# EAGLE board SparkFun_GNSS_NEO-M9N-Panel (EAGLE 9.6.2), part 1 of 3
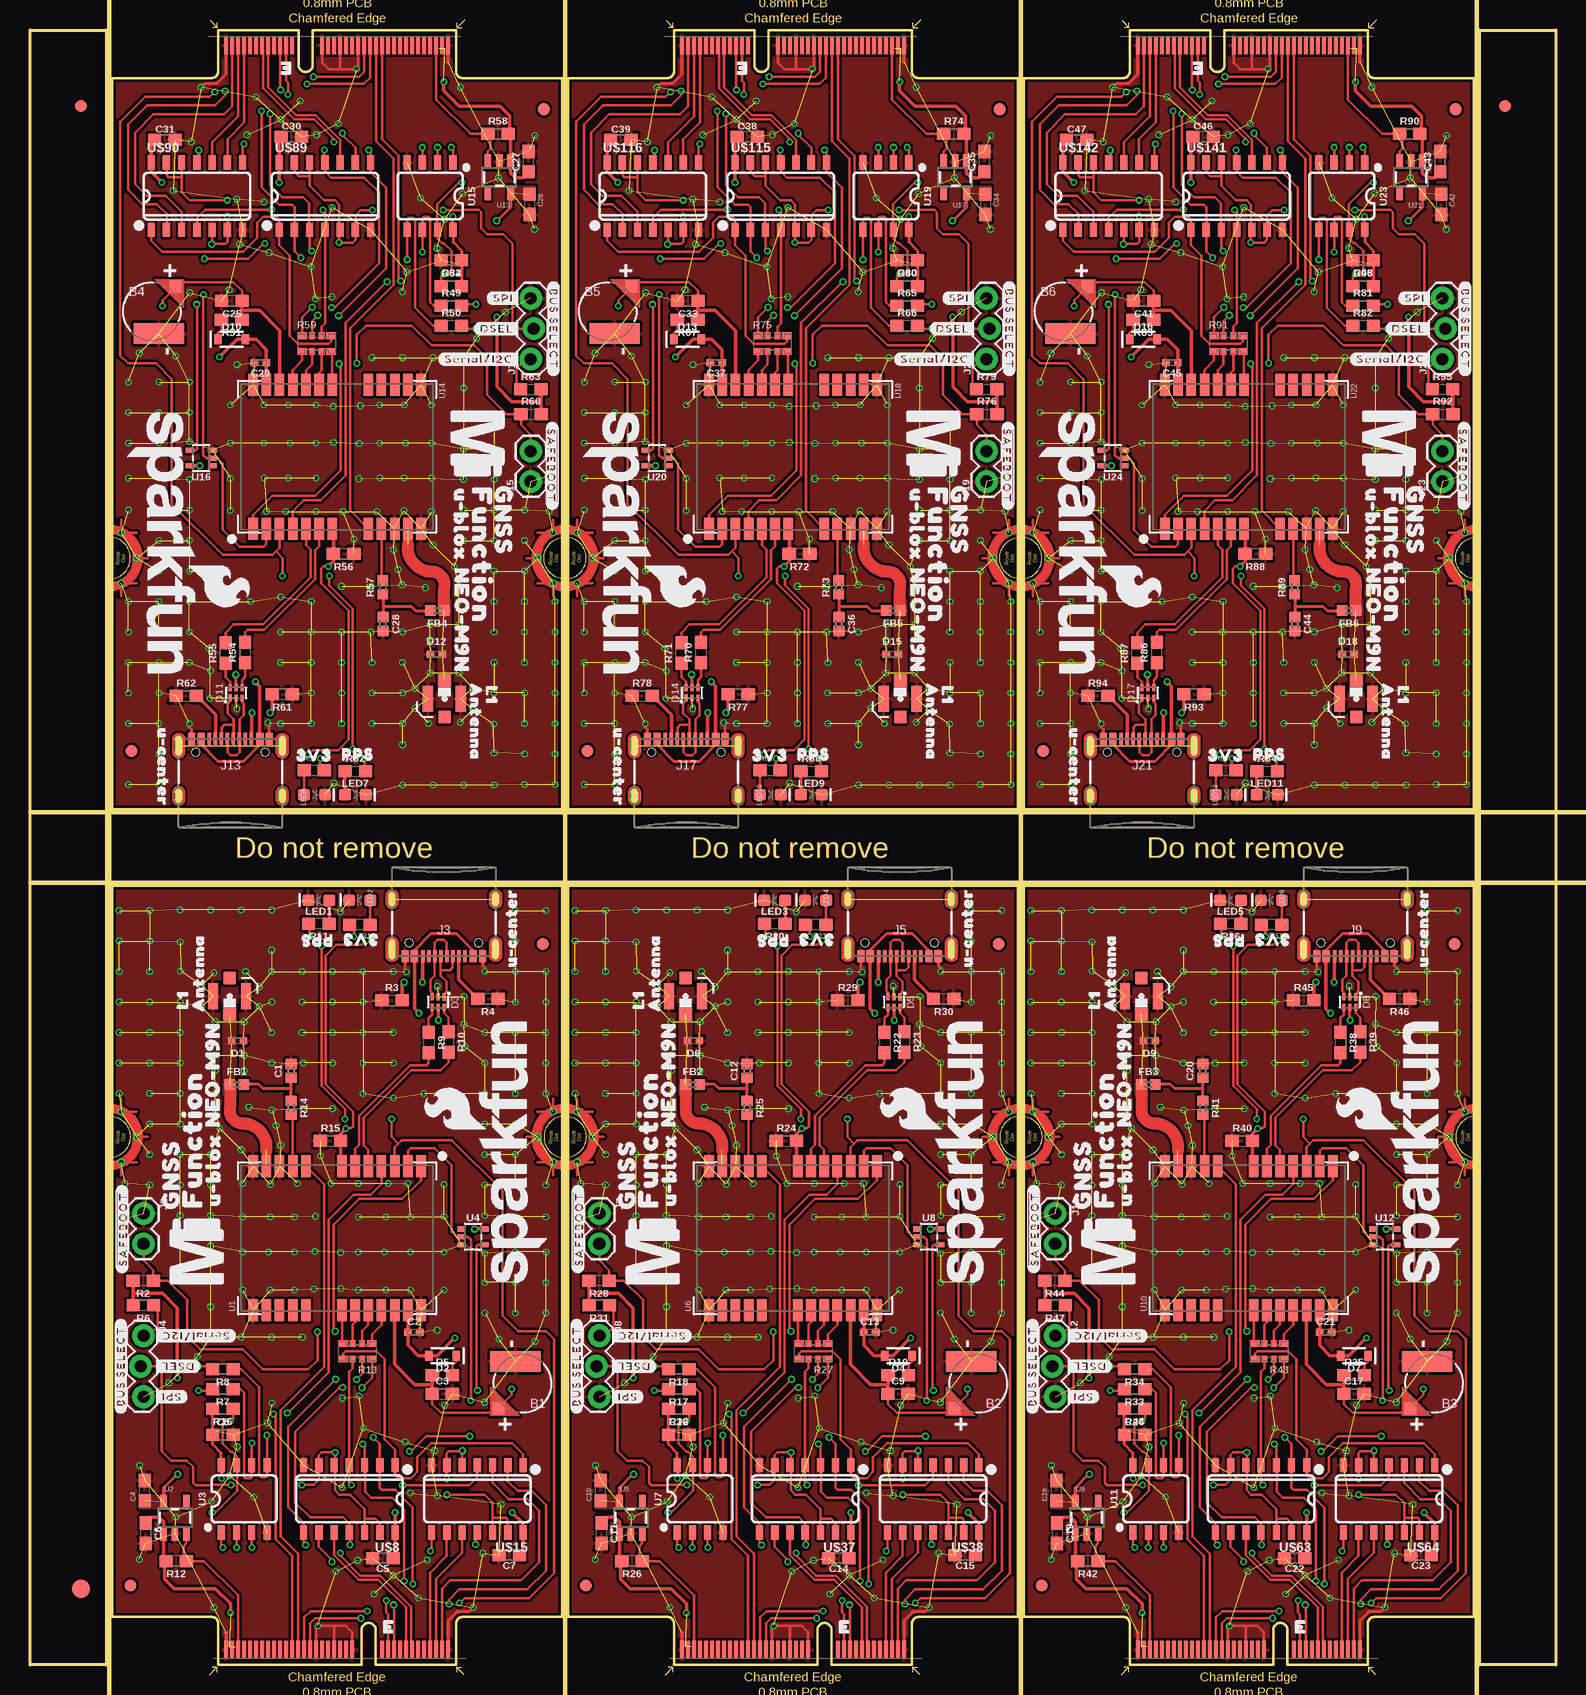
[diagram p0: board, top side]
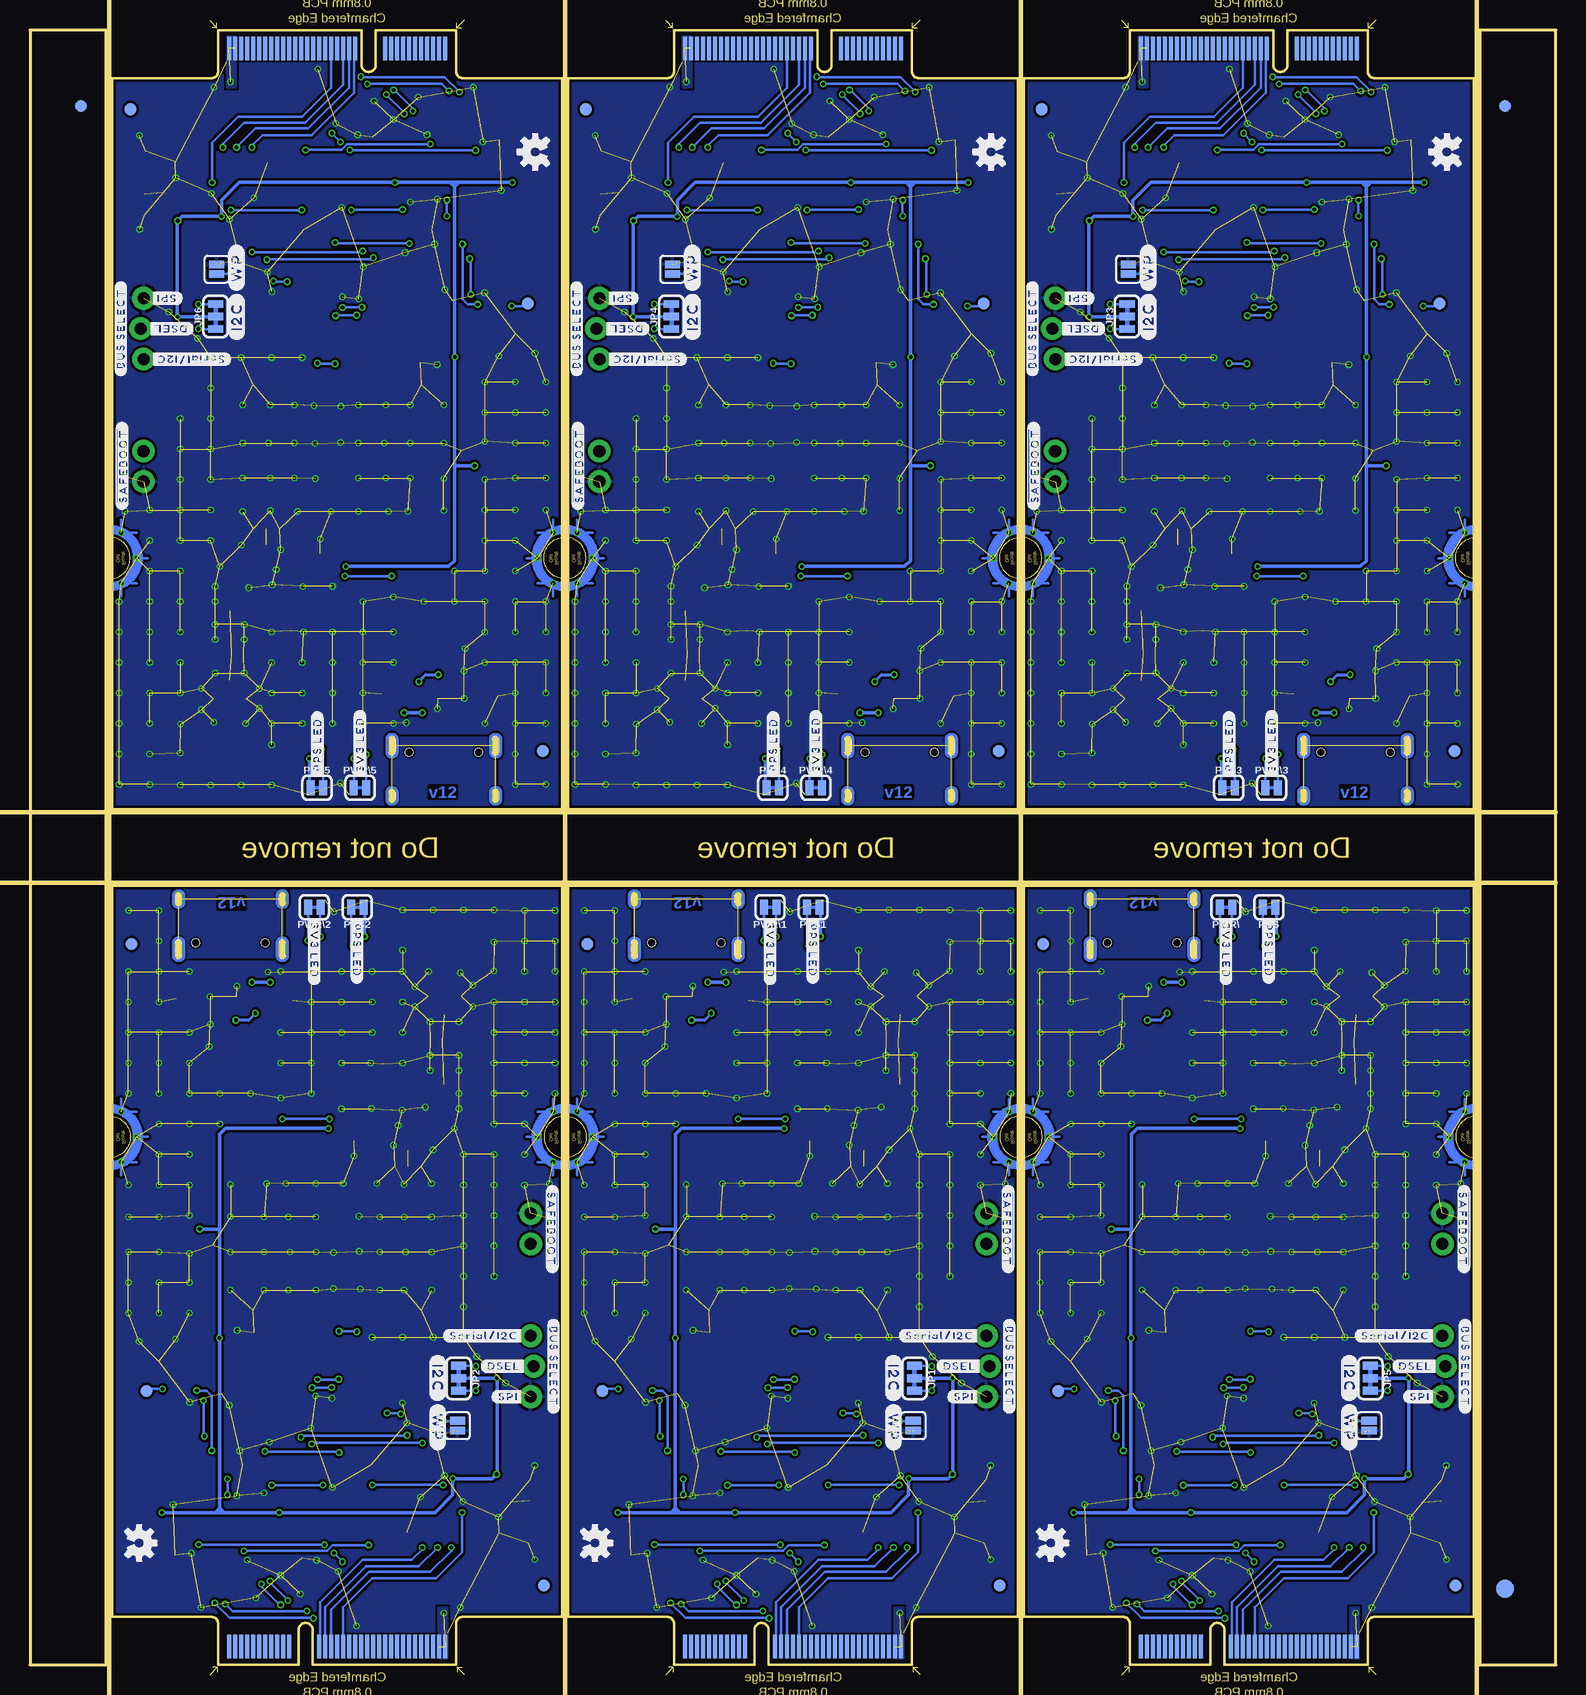
[diagram p1: board, bottom side, seen from below]

Size 127.2 x 136.25 mm. Coordinates in mm from the lower left corner, seen from the top.
Outline: 35.53,0 28.83,0 28.83,2.9 arc180 27.63,2.9 27.63,0 15.68,0 15.68,3.5 arc84 15.2,4 6.86,4 6.86,64.95 20.12,64.95 19.99,64.92 44.35,64.92 44.35,4 36.03,4 arc84 35.53,3.5 35.53,0
Outline: 73.53,0 66.83,0 66.83,2.9 arc180 65.63,2.9 65.63,0 53.68,0 53.68,3.5 arc84 53.2,4 44.86,4 44.86,64.95 58.11,64.95 57.99,64.92 82.35,64.92 82.35,4 74.03,4 arc84 73.53,3.5 73.53,0
Outline: 111.53,0 104.83,0 104.83,2.9 arc180 103.62,2.9 103.62,0 91.67,0 91.67,3.5 arc84 91.2,4 82.86,4 82.86,64.95 96.11,64.95 95.99,64.92 120.34,64.92 120.34,4 112.03,4 arc84 111.53,3.5 111.53,0
Outline: 15.68,136.25 22.38,136.25 22.38,133.35 arc180 23.58,133.35 23.58,136.25 35.53,136.25 35.53,132.75 arc84 36,132.25 44.35,132.25 44.35,71.3 31.09,71.3 31.22,71.32 6.86,71.32 6.86,132.25 15.18,132.25 arc84 15.68,132.75 15.68,136.25
Outline: 53.68,136.25 60.38,136.25 60.38,133.35 arc180 61.58,133.35 61.58,136.25 73.53,136.25 73.53,132.75 arc84 74,132.25 82.35,132.25 82.35,71.3 69.09,71.3 69.22,71.32 44.86,71.32 44.86,132.25 53.18,132.25 arc84 53.68,132.75 53.68,136.25
Outline: 91.67,136.25 98.38,136.25 98.38,133.35 arc180 99.58,133.35 99.58,136.25 111.53,136.25 111.53,132.75 arc84 112,132.25 120.34,132.25 120.34,71.3 107.09,71.3 107.21,71.32 82.86,71.32 82.86,132.25 91.17,132.25 arc84 91.67,132.75 91.67,136.25
Outline: 120.85,136.25 127.2,136.25 127.2,0 120.85,0 120.85,136.25
Outline: 0,136.25 6.35,136.25 6.35,0 0,0 0,136.25
Copper layers (1*16): Top 0.035mm / dielectric 1.5mm / Bottom 0.035mm
Design rules "SparkFun_GNSS_NEO-M9N": minimum track width 5mil, minimum drill 0.3mm, track to track 5mil, track to pad 5mil, pad to pad 5mil, via to via 5mil, smd to smd 5mil, copper to edge 7mil, drill to drill 7mil, minimum pad ring 5mil, minimum via ring 5mil, stop-mask expansion 2.5mil, vias tented up to drill 25mil, thermal gap 10mil
Net classes: 0 default: width 0.203 mm; 2 3.3V: width 0.203 mm; 3 Antenna: width 1 mm, clearance 0.3 mm
Milling: 6 lines

## Footprints (pad centres in the part's own frame; a part is rotated, then mirrored left to right if it is on the bottom)
MS421R_IV03E = smd 1 x 1: + 2.022,2.032 | smd 4.2 x 1.7: - 0.6,-1.85
0402 = smd 0.85 x 0.9: 1 -0.58,0; 2 0.58,0
0402-TIGHT = smd 0.6 x 0.6: 1 -0.5,0; 2 0.5,0
0603 = smd 1.1 x 1: 1 -0.85,0; 2 0.85,0
SOD-323 = smd 0.63 x 0.83: A 1.15,0; C -1.15,0
SOT886 = smd 0.61 x 0.25: 1 -0.405,0.5 | smd 0.56 x 0.25: 2 -0.43,0; 3 -0.43,-0.5; 4 0.43,-0.5; 5 0.43,0; 6 0.43,0.5
U.FL = smd 2.2 x 0.85: 1 0,1.375; 2 0,-1.375 | smd 1.05 x 1: FEED 1.525,0; NC -1.525,0
FIDUCIAL-1X2 = smd 1 x 1: 1 0,0
FIDUCIAL-1.5X3 = smd 1.5 x 1.5: 1 0,0
M.2-CARD-E-22_FUNCTION_STANDARD = smd 0.35 x 1.45: 1 9.25,1.275; 3 8.75,1.275; 5 8.25,1.275; 7 7.75,1.275; 9 7.25,1.275; 11 6.75,1.275; 13 6.25,1.275; 15 5.75,1.275; 17 5.25,1.275; 19 4.75,1.275; 21 4.25,1.275; 23 3.75,1.275; 33 1.25,1.275; 35 0.75,1.275; 37 0.25,1.275; 39 -0.25,1.275; 41 -0.75,1.275; 43 -1.25,1.275; 45 -1.75,1.275; 47 -2.25,1.275; 49 -2.75,1.275; 51 -3.25,1.275; 53 -3.75,1.275; 55 -4.25,1.275; 57 -4.75,1.275; 59 -5.25,1.275; 61 -5.75,1.275; 63 -6.25,1.275; 65 -6.75,1.275; 67 -7.25,1.275; 69 -7.75,1.275; 71 -8.25,1.275; 73 -8.75,1.275; 75 -9.25,1.275 | smd 0.35 x 1.95 bottom: 2 9,1.525; 4 8.5,1.525; 6 8,1.525; 8 7.5,1.525; 10 7,1.525; 12 6.5,1.525; 14 6,1.525; 16 5.5,1.525; 18 5,1.525; 20 4.5,1.525; 22 4,1.525; 32 1.5,1.525; 34 1,1.525; 36 0.5,1.525; 38 0,1.525; 40 -0.5,1.525; 42 -1,1.525; 44 -1.5,1.525; 46 -2,1.525; 48 -2.5,1.525; 50 -3,1.525; 52 -3.5,1.525; 54 -4,1.525; 56 -4.5,1.525; 58 -5,1.525; 60 -5.5,1.525; 62 -6,1.525; 64 -6.5,1.525; 66 -7,1.525; 68 -7.5,1.525; 70 -8,1.525; 72 -8.5,1.525; 74 -9,1.525 | drill 0.305 pad 0.61: GND1 -18,41.9; GND2 -16.7,44; GND3 -18,46.1; GND4 18,41.9; GND5 16.7,44; GND6 18,46.1
1X02 = drill 1.016 pad 1.88: 1 0,0; 2 2.54,0
USB-C-16P-2LAYER-PADS = smd 0.3 x 1: A5 -1.25,-0.34; A6 -0.25,-0.34; A7 0.25,-0.34; A8 1.25,-0.34; B5 1.75,-0.34; B6 0.75,-0.34; B7 -0.75,-0.34; B8 -1.75,-0.34 | smd 0.6 x 1: GND -3.225,-0.34; GND2 3.225,-0.34; VBUS1 -2.45,-0.34; VBUS2 2.45,-0.34 | drill 0.4 pad 0.6 long: SHLD1 -4.318,-0.915; SHLD2 4.318,-0.915; SHLD3 -4.318,-5.095; SHLD4 4.318,-5.095 | hole 0.65: -2.89,-1.445; 2.89,-1.445
1X03_LOCK = drill 1.016 pad 1.88: 1 0,0.127; 2 2.54,-0.127; 3 5.08,0.127
SMT-JUMPER_3_2-NC_TRACE_SILK = smd 0.66 x 1.27: 1 -1.041,0; 2 0,0; 3 1.041,0
LED-0603 = smd 1 x 1: A -0.877,0; C 0.877,0
SMT-JUMPER_2_NC_TRACE_SILK = smd 0.66 x 1.27: 1 -0.521,0; 2 0.521,0
1206_RA = smd 0.8 x 0.55: P1 -1.2,-0.62; P4 1.2,-0.62; P5 1.2,0.68; P8 -1.2,0.68 | smd 0.5 x 0.55: P2 -0.4,-0.62; P3 0.4,-0.62; P6 0.4,0.68; P7 -0.4,0.68
PAD.03X.04 = smd 1.016 x 1.016: 1 0,0
NEO-M9N/M8T/M8U/D9S = smd 1.8 x 0.8: 1 6,-7; 2 6,-5.9; 3 6,-4.8; 4 6,-3.7; 5 6,-2.6; 6 6,-1.5; 7 6,-0.4; 8 6,2.6; 9 6,3.7; 10 6,4.8; 11 6,5.9; 12 6,7; 13 -6,7; 14 -6,5.9; 15 -6,4.8; 16 -6,3.7; 17 -6,2.6; 18 -6,-0.4; 19 -6,-1.5; 20 -6,-2.6; 21 -6,-3.7; 22 -6,-4.8; 23 -6,-5.9; 24 -6,-7
SOT23-5 = smd 0.55 x 1.2: 1 -0.95,-1.3; 2 0,-1.3; 3 0.95,-1.3; 4 0.95,1.3; 5 -0.95,1.3
SO08 = smd 0.6 x 1.2: 1 -1.905,-2.8; 2 -0.635,-2.8; 3 0.635,-2.8; 4 1.905,-2.8; 5 1.905,2.8; 6 0.635,2.8; 7 -0.635,2.8; 8 -1.905,2.8
SOT353 = smd 0.42 x 0.7: 1 -0.65,-0.95; 2 0,-0.95; 3 0.65,-0.95; 4 0.65,0.95; 5 -0.65,0.95
SO14 = smd 0.6 x 1.2: 1 -3.175,-2.8; 2 -1.905,-2.8; 3 -0.635,-2.8; 4 0.635,-2.8; 5 1.905,-2.8; 6 3.175,-2.8; 7 4.445,-2.8; 8 4.445,2.8; 9 3.175,2.8; 10 1.905,2.8; 11 0.635,2.8; 12 -0.635,2.8; 13 -1.905,2.8; 14 -3.175,2.8
SMT-JUMPER_2_NO_SILK = smd 0.635 x 1.27: 1 -0.406,0; 2 0.406,0

## Placement (x,y rotation side)
B1  6.8MM_COIN_CELL  [MS421R_IV03E]  41.07,23.44 180 top
B2  6.8MM_COIN_CELL  [MS421R_IV03E]  79.07,23.44 180 top
B3  6.8MM_COIN_CELL  [MS421R_IV03E]  117.07,23.44 180 top
B4  6.8MM_COIN_CELL  [MS421R_IV03E]  10.13,112.8 0 top
B5  6.8MM_COIN_CELL  [MS421R_IV03E]  48.13,112.8 0 top
B6  6.8MM_COIN_CELL  [MS421R_IV03E]  86.13,112.8 0 top
C1  47pF  [0402]  21.77,49.5 90 top
C2  0.1uF  [0402-TIGHT]  32,27.74 0 top
C3  1.0uF  [0603]  34.36,22.58 0 top
C4  1.0uF  [0603]  9.58,14.53 90 top
C5  0.1uF  [0603]  29.41,8.89 180 top
C6  1.0uF  [0603]  9.63,10.97 270 top
C7  0.1uF  [0603]  39.95,9.14 180 top
C8  0.1uF  [0603]  16.08,19.18 0 top
C9  1.0uF  [0603]  72.36,22.58 0 top
C10  1.0uF  [0603]  47.57,14.53 90 top
C11  1.0uF  [0603]  47.62,10.97 270 top
C12  47pF  [0402]  59.77,49.5 90 top
C13  0.1uF  [0402-TIGHT]  70,27.74 0 top
C14  0.1uF  [0603]  67.41,8.89 180 top
C15  0.1uF  [0603]  77.95,9.14 180 top
C16  0.1uF  [0603]  54.08,19.18 0 top
C17  1.0uF  [0603]  110.36,22.58 0 top
C18  1.0uF  [0603]  85.57,14.53 90 top
C19  1.0uF  [0603]  85.62,10.97 270 top
C20  47pF  [0402]  97.77,49.5 90 top
C21  0.1uF  [0402-TIGHT]  108,27.74 0 top
C22  0.1uF  [0603]  105.41,8.89 180 top
C23  0.1uF  [0603]  115.95,9.14 180 top
C24  0.1uF  [0603]  92.08,19.18 0 top
C25  1.0uF  [0603]  16.84,113.67 180 top
C26  1.0uF  [0603]  41.63,121.72 270 top
C27  1.0uF  [0603]  41.58,125.27 90 top
C28  47pF  [0402]  29.43,86.74 270 top
C29  0.1uF  [0402-TIGHT]  19.2,108.51 180 top
C30  0.1uF  [0603]  21.79,127.36 0 top
C31  0.1uF  [0603]  11.25,127.1 0 top
C32  0.1uF  [0603]  35.13,117.07 180 top
C33  1.0uF  [0603]  54.84,113.67 180 top
C34  1.0uF  [0603]  79.63,121.72 270 top
C35  1.0uF  [0603]  79.58,125.27 90 top
C36  47pF  [0402]  67.43,86.74 270 top
C37  0.1uF  [0402-TIGHT]  57.2,108.51 180 top
C38  0.1uF  [0603]  59.79,127.36 0 top
C39  0.1uF  [0603]  49.25,127.1 0 top
C40  0.1uF  [0603]  73.13,117.07 180 top
C41  1.0uF  [0603]  92.84,113.67 180 top
C42  1.0uF  [0603]  117.63,121.72 270 top
C43  1.0uF  [0603]  117.58,125.27 90 top
C44  47pF  [0402]  105.43,86.74 270 top
C45  0.1uF  [0402-TIGHT]  95.2,108.51 180 top
C46  0.1uF  [0603]  97.79,127.36 0 top
C47  0.1uF  [0603]  87.25,127.1 0 top
C48  0.1uF  [0603]  111.12,117.07 180 top
D1  PESD0402-0402T  [0402-TIGHT]  17.32,52.03 180 top
D2  0.5A/40V/420mV  [SOD-323]  34.39,25.78 180 top
D3  PRTR5V0U2F  [SOT886]  34.01,55.24 270 top
D4  0.5A/40V/420mV  [SOD-323]  72.39,25.78 180 top
D5  PRTR5V0U2F  [SOT886]  72.01,55.24 270 top
D6  PESD0402-0402T  [0402-TIGHT]  55.32,52.03 180 top
D7  0.5A/40V/420mV  [SOD-323]  110.39,25.78 180 top
D8  PRTR5V0U2F  [SOT886]  110.01,55.24 270 top
D9  PESD0402-0402T  [0402-TIGHT]  93.32,52.03 180 top
D10  0.5A/40V/420mV  [SOD-323]  16.82,110.46 0 top
D11  PRTR5V0U2F  [SOT886]  17.2,81 90 top
D12  PESD0402-0402T  [0402-TIGHT]  33.88,84.22 0 top
D13  0.5A/40V/420mV  [SOD-323]  54.81,110.46 0 top
D14  PRTR5V0U2F  [SOT886]  55.19,81 90 top
D15  PESD0402-0402T  [0402-TIGHT]  71.88,84.22 0 top
D16  0.5A/40V/420mV  [SOD-323]  92.81,110.46 0 top
D17  PRTR5V0U2F  [SOT886]  93.19,81 90 top
D18  PESD0402-0402T  [0402-TIGHT]  109.88,84.22 0 top
E1  U.FL  [U.FL]  16.66,55.73 270 top
E2  U.FL  [U.FL]  54.66,55.73 270 top
E3  U.FL  [U.FL]  92.65,55.73 270 top
E4  U.FL  [U.FL]  34.55,80.52 90 top
E5  U.FL  [U.FL]  72.55,80.52 90 top
E6  U.FL  [U.FL]  110.55,80.52 90 top
E$1  [FIDUCIAL-1X2]  4.23,129.9 0 top
E$2  [FIDUCIAL-1X2]  4.23,129.9 0 bottom
E$3  [FIDUCIAL-1X2]  122.97,129.9 0 top
E$4  [FIDUCIAL-1X2]  122.97,129.9 0 bottom
E$5  [FIDUCIAL-1.5X3]  4.23,6.35 0 top
E$6  [FIDUCIAL-1.5X3]  4.23,6.35 0 bottom
FB1  120Ω  [0402]  17.25,48.38 0 top
FB2  120Ω  [0402]  55.25,48.38 0 top
FB3  120Ω  [0402]  93.24,48.38 0 top
FB4  120Ω  [0402]  33.96,87.87 180 top
FB5  120Ω  [0402]  71.96,87.87 180 top
FB6  120Ω  [0402]  109.96,87.87 180 top
FD1  FIDUCIAL1X2  [FIDUCIAL-1X2]  8.36,6.6 270 bottom
FD2  FIDUCIAL1X2  [FIDUCIAL-1X2]  8.36,6.6 90 top
FD3  FIDUCIAL1X2  [FIDUCIAL-1X2]  42.75,60.07 270 bottom
FD4  FIDUCIAL1X2  [FIDUCIAL-1X2]  42.75,60.07 90 top
FD5  FIDUCIAL1X2  [FIDUCIAL-1X2]  46.35,6.6 270 bottom
FD6  FIDUCIAL1X2  [FIDUCIAL-1X2]  46.35,6.6 90 top
FD7  FIDUCIAL1X2  [FIDUCIAL-1X2]  80.75,60.07 270 bottom
FD8  FIDUCIAL1X2  [FIDUCIAL-1X2]  80.75,60.07 90 top
FD9  FIDUCIAL1X2  [FIDUCIAL-1X2]  84.35,6.6 270 bottom
FD10  FIDUCIAL1X2  [FIDUCIAL-1X2]  84.35,6.6 90 top
FD11  FIDUCIAL1X2  [FIDUCIAL-1X2]  118.75,60.07 270 bottom
FD12  FIDUCIAL1X2  [FIDUCIAL-1X2]  118.75,60.07 90 top
FD13  FIDUCIAL1X2  [FIDUCIAL-1X2]  42.85,129.64 90 bottom
FD14  FIDUCIAL1X2  [FIDUCIAL-1X2]  42.85,129.64 270 top
FD15  FIDUCIAL1X2  [FIDUCIAL-1X2]  8.46,76.18 90 bottom
FD16  FIDUCIAL1X2  [FIDUCIAL-1X2]  8.46,76.18 270 top
FD17  FIDUCIAL1X2  [FIDUCIAL-1X2]  80.85,129.64 90 bottom
FD18  FIDUCIAL1X2  [FIDUCIAL-1X2]  80.85,129.64 270 top
FD19  FIDUCIAL1X2  [FIDUCIAL-1X2]  46.46,76.18 90 bottom
FD20  FIDUCIAL1X2  [FIDUCIAL-1X2]  46.46,76.18 270 top
FD21  FIDUCIAL1X2  [FIDUCIAL-1X2]  118.85,129.64 90 bottom
FD22  FIDUCIAL1X2  [FIDUCIAL-1X2]  118.85,129.64 270 top
FD23  FIDUCIAL1X2  [FIDUCIAL-1X2]  84.45,76.18 90 bottom
FD24  FIDUCIAL1X2  [FIDUCIAL-1X2]  84.45,76.18 270 top
J1  MICROMOD_FUNCTION_STANDARD  [M.2-CARD-E-22_FUNCTION_STANDARD]  25.6,0 0 top
J2  [1X02]  9.47,37.63 270 top
J3  [USB-C-16P-2LAYER-PADS]  34.49,58.72 180 top
J4  Bus Selection  [1X03_LOCK]  9.35,27.43 270 top
J5  [USB-C-16P-2LAYER-PADS]  72.49,58.72 180 top
J6  MICROMOD_FUNCTION_STANDARD  [M.2-CARD-E-22_FUNCTION_STANDARD]  63.6,0 0 top
J7  [1X02]  47.46,37.63 270 top
J8  Bus Selection  [1X03_LOCK]  47.35,27.43 270 top
J9  [USB-C-16P-2LAYER-PADS]  110.49,58.72 180 top
J10  MICROMOD_FUNCTION_STANDARD  [M.2-CARD-E-22_FUNCTION_STANDARD]  101.6,0 0 top
J11  [1X02]  85.46,37.63 270 top
J12  Bus Selection  [1X03_LOCK]  85.34,27.43 270 top
J13  [USB-C-16P-2LAYER-PADS]  16.71,77.52 0 top
J14  MICROMOD_FUNCTION_STANDARD  [M.2-CARD-E-22_FUNCTION_STANDARD]  25.6,136.25 180 top
J15  [1X02]  41.74,98.61 90 top
J16  Bus Selection  [1X03_LOCK]  41.86,108.81 90 top
J17  [USB-C-16P-2LAYER-PADS]  54.71,77.52 0 top
J18  MICROMOD_FUNCTION_STANDARD  [M.2-CARD-E-22_FUNCTION_STANDARD]  63.6,136.25 180 top
J19  [1X02]  79.74,98.61 90 top
J20  Bus Selection  [1X03_LOCK]  79.86,108.81 90 top
J21  [USB-C-16P-2LAYER-PADS]  92.71,77.52 0 top
J22  MICROMOD_FUNCTION_STANDARD  [M.2-CARD-E-22_FUNCTION_STANDARD]  101.6,136.25 180 top
J23  [1X02]  117.74,98.61 90 top
J24  Bus Selection  [1X03_LOCK]  117.86,108.81 90 top
JP1  JUMPER-SMT_3_2-NC_TRACE_SILK  [SMT-JUMPER_3_2-NC_TRACE_SILK]  53.47,23.88 270 bottom
JP2  JUMPER-SMT_3_2-NC_TRACE_SILK  [SMT-JUMPER_3_2-NC_TRACE_SILK]  91.47,23.88 270 bottom
JP3  JUMPER-SMT_3_2-NC_TRACE_SILK  [SMT-JUMPER_3_2-NC_TRACE_SILK]  35.74,112.37 90 bottom
JP4  JUMPER-SMT_3_2-NC_TRACE_SILK  [SMT-JUMPER_3_2-NC_TRACE_SILK]  73.74,112.37 90 bottom
JP5  JUMPER-SMT_3_2-NC_TRACE_SILK  [SMT-JUMPER_3_2-NC_TRACE_SILK]  15.47,23.88 270 bottom
JP6  JUMPER-SMT_3_2-NC_TRACE_SILK  [SMT-JUMPER_3_2-NC_TRACE_SILK]  111.73,112.37 90 bottom
LED1  BLUE  [LED-0603]  24.08,63.73 180 top
LED2  RED  [LED-0603]  27.48,63.73 180 top
LED3  BLUE  [LED-0603]  62.08,63.73 180 top
LED4  RED  [LED-0603]  65.48,63.73 180 top
LED5  BLUE  [LED-0603]  100.08,63.73 180 top
LED6  RED  [LED-0603]  103.48,63.73 180 top
LED7  BLUE  [LED-0603]  27.13,72.52 0 top
LED8  RED  [LED-0603]  23.72,72.52 0 top
LED9  BLUE  [LED-0603]  65.13,72.52 0 top
LED10  RED  [LED-0603]  61.72,72.52 0 top
LED11  BLUE  [LED-0603]  103.12,72.52 0 top
LED12  RED  [LED-0603]  99.72,72.52 0 top
LOGO1  SFE_LOGO_NAME_FLAME.2_INCH  [SFE_LOGO_NAME_FLAME_.2]  78.23,42.8 90 top
LOGO2  SFE_LOGO_NAME_FLAME.2_INCH  [SFE_LOGO_NAME_FLAME_.2]  40.23,42.8 90 top
LOGO3  OSHW-LOGOS  [OSHW-LOGO-S]  42.11,10.16 270 bottom
LOGO4  OSHW-LOGOS  [OSHW-LOGO-S]  80.11,10.16 270 bottom
LOGO5  SFE_LOGO_NAME_FLAME.2_INCH  [SFE_LOGO_NAME_FLAME_.2]  116.23,42.8 90 top
LOGO6  OSHW-LOGOS  [OSHW-LOGO-S]  118.11,10.16 270 bottom
LOGO7  SFE_LOGO_NAME_FLAME.2_INCH  [SFE_LOGO_NAME_FLAME_.2]  10.97,93.45 270 top
LOGO8  OSHW-LOGOS  [OSHW-LOGO-S]  9.09,126.09 90 bottom
LOGO9  SFE_LOGO_NAME_FLAME.2_INCH  [SFE_LOGO_NAME_FLAME_.2]  48.97,93.45 270 top
LOGO10  OSHW-LOGOS  [OSHW-LOGO-S]  47.09,126.09 90 bottom
LOGO11  SFE_LOGO_NAME_FLAME.2_INCH  [SFE_LOGO_NAME_FLAME_.2]  86.97,93.45 270 top
LOGO12  OSHW-LOGOS  [OSHW-LOGO-S]  85.09,126.09 90 bottom
PPS  JUMPER-SMT_2_NC_TRACE_SILK  [SMT-JUMPER_2_NC_TRACE_SILK]  23.93,63.14 180 bottom
PPS1  JUMPER-SMT_2_NC_TRACE_SILK  [SMT-JUMPER_2_NC_TRACE_SILK]  61.93,63.14 180 bottom
PPS2  JUMPER-SMT_2_NC_TRACE_SILK  [SMT-JUMPER_2_NC_TRACE_SILK]  99.92,63.14 180 bottom
PPS3  JUMPER-SMT_2_NC_TRACE_SILK  [SMT-JUMPER_2_NC_TRACE_SILK]  27.28,73.1 0 bottom
PPS4  JUMPER-SMT_2_NC_TRACE_SILK  [SMT-JUMPER_2_NC_TRACE_SILK]  65.28,73.1 0 bottom
PPS5  JUMPER-SMT_2_NC_TRACE_SILK  [SMT-JUMPER_2_NC_TRACE_SILK]  103.28,73.1 0 bottom
PWR\  JUMPER-SMT_2_NC_TRACE_SILK  [SMT-JUMPER_2_NC_TRACE_SILK]  27.51,63.14 180 bottom
PWR\1  JUMPER-SMT_2_NC_TRACE_SILK  [SMT-JUMPER_2_NC_TRACE_SILK]  65.51,63.14 180 bottom
PWR\2  JUMPER-SMT_2_NC_TRACE_SILK  [SMT-JUMPER_2_NC_TRACE_SILK]  103.51,63.14 180 bottom
PWR\3  JUMPER-SMT_2_NC_TRACE_SILK  [SMT-JUMPER_2_NC_TRACE_SILK]  23.7,73.1 0 bottom
PWR\4  JUMPER-SMT_2_NC_TRACE_SILK  [SMT-JUMPER_2_NC_TRACE_SILK]  61.7,73.1 0 bottom
PWR\5  JUMPER-SMT_2_NC_TRACE_SILK  [SMT-JUMPER_2_NC_TRACE_SILK]  99.7,73.1 0 bottom
R1  1k  [0603]  27.51,61.7 180 top
R2  10k  [0603]  9.43,32.02 180 top
R3  5.1k  [0603]  30.18,55.37 0 top
R4  5.1k  [0603]  38.18,55.5 180 top
R5  3.3k  [0603]  34.39,24.16 0 top
R6  10k  [0603]  9.45,29.95 180 top
R7  2.2k  [0603]  16.08,22.99 180 top
R8  2.2k  [0603]  16.08,24.64 180 top
R9  27  [0603]  33.25,51.87 270 top
R10  27  [0603]  34.9,51.92 270 top
R11  1k  [0603]  24.08,61.77 180 top
R12  100k  [0603]  12.19,8.66 180 top
R13  33  [1206_RA]  27.3,26.16 180 top
R14  33  [0402]  21.78,46.43 270 top
R15  100k  [0603]  25.06,43.66 0 top
R16  10k  [0603]  16.08,21.34 180 top
R17  2.2k  [0603]  54.08,22.99 180 top
R18  2.2k  [0603]  54.08,24.64 180 top
R19  3.3k  [0603]  72.39,24.16 0 top
R20  1k  [0603]  62.08,61.77 180 top
R21  1k  [0603]  65.51,61.7 180 top
R22  27  [0603]  71.25,51.87 270 top
R23  27  [0603]  72.9,51.92 270 top
R24  100k  [0603]  63.06,43.66 0 top
R25  33  [0402]  59.78,46.43 270 top
R26  100k  [0603]  50.19,8.66 180 top
R27  33  [1206_RA]  65.3,26.16 180 top
R28  10k  [0603]  47.43,32.02 180 top
R29  5.1k  [0603]  68.17,55.37 0 top
R30  5.1k  [0603]  76.17,55.5 180 top
R31  10k  [0603]  47.45,29.95 180 top
R32  10k  [0603]  54.08,21.34 180 top
R33  2.2k  [0603]  92.08,22.99 180 top
R34  2.2k  [0603]  92.08,24.64 180 top
R35  3.3k  [0603]  110.39,24.16 0 top
R36  1k  [0603]  100.08,61.77 180 top
R37  1k  [0603]  103.51,61.7 180 top
R38  27  [0603]  109.25,51.87 270 top
R39  27  [0603]  110.9,51.92 270 top
R40  100k  [0603]  101.06,43.66 0 top
R41  33  [0402]  97.78,46.43 270 top
R42  100k  [0603]  88.19,8.66 180 top
R43  33  [1206_RA]  103.3,26.16 180 top
R44  10k  [0603]  85.43,32.02 180 top
R45  5.1k  [0603]  106.17,55.37 0 top
R46  5.1k  [0603]  114.17,55.5 180 top
R47  10k  [0603]  85.45,29.95 180 top
R48  10k  [0603]  92.08,21.34 180 top
R49  2.2k  [0603]  35.13,113.26 0 top
R50  2.2k  [0603]  35.13,111.61 0 top
R51  3.3k  [0603]  16.82,112.09 180 top
R52  1k  [0603]  27.13,74.47 0 top
R53  1k  [0603]  23.7,74.55 0 top
R54  27  [0603]  17.96,84.38 90 top
R55  27  [0603]  16.31,84.33 90 top
R56  100k  [0603]  26.15,92.58 180 top
R57  33  [0402]  29.42,89.81 90 top
R58  100k  [0603]  39.01,127.58 0 top
R59  33  [1206_RA]  23.9,110.08 0 top
R60  10k  [0603]  41.77,104.23 0 top
R61  5.1k  [0603]  21.03,80.87 180 top
R62  5.1k  [0603]  13.03,80.75 0 top
R63  10k  [0603]  41.75,106.29 0 top
R64  10k  [0603]  35.13,114.91 0 top
R65  2.2k  [0603]  73.13,113.26 0 top
R66  2.2k  [0603]  73.13,111.61 0 top
R67  3.3k  [0603]  54.81,112.09 180 top
R68  1k  [0603]  65.13,74.47 0 top
R69  1k  [0603]  61.7,74.55 0 top
R70  27  [0603]  55.96,84.38 90 top
R71  27  [0603]  54.31,84.33 90 top
R72  100k  [0603]  64.15,92.58 180 top
R73  33  [0402]  67.42,89.81 90 top
R74  100k  [0603]  77.01,127.58 0 top
R75  33  [1206_RA]  61.9,110.08 0 top
R76  10k  [0603]  79.77,104.23 0 top
R77  5.1k  [0603]  59.03,80.87 180 top
R78  5.1k  [0603]  51.03,80.75 0 top
R79  10k  [0603]  79.75,106.29 0 top
R80  10k  [0603]  73.13,114.91 0 top
R81  2.2k  [0603]  111.12,113.26 0 top
R82  2.2k  [0603]  111.12,111.61 0 top
R83  3.3k  [0603]  92.81,112.09 180 top
R84  1k  [0603]  103.12,74.47 0 top
R85  1k  [0603]  99.7,74.55 0 top
R86  27  [0603]  93.95,84.38 90 top
R87  27  [0603]  92.3,84.33 90 top
R88  100k  [0603]  102.15,92.58 180 top
R89  33  [0402]  105.42,89.81 90 top
R90  100k  [0603]  115.01,127.58 0 top
R91  33  [1206_RA]  99.9,110.08 0 top
R92  10k  [0603]  117.77,104.23 0 top
R93  5.1k  [0603]  97.03,80.87 180 top
R94  5.1k  [0603]  89.03,80.75 0 top
R95  10k  [0603]  117.75,106.29 0 top
R96  10k  [0603]  111.12,114.91 0 top
TP1  TEST-POINT3X4  [PAD.03X.04]  41.5,22.81 180 bottom
TP2  TEST-POINT3X4  [PAD.03X.04]  79.5,22.81 180 bottom
TP3  TEST-POINT3X4  [PAD.03X.04]  117.5,22.81 180 bottom
TP4  TEST-POINT3X4  [PAD.03X.04]  9.7,113.44 0 bottom
TP5  TEST-POINT3X4  [PAD.03X.04]  47.7,113.44 0 bottom
TP6  TEST-POINT3X4  [PAD.03X.04]  85.7,113.44 0 bottom
U1  U-BLOX_NEO-M9N  [NEO-M9N/M8T/M8U/D9S]  25.6,35.56 90 top
U2  3.3V  [SOT23-5]  12.09,12.27 0 top
U3  EEPROM  [SO08]  17.86,13.84 0 top
U4  74HC1G04  [SOT353]  36.93,35.68 270 top
U5  3.3V  [SOT23-5]  50.09,12.27 0 top
U6  U-BLOX_NEO-M9N  [NEO-M9N/M8T/M8U/D9S]  63.6,35.56 90 top
U7  EEPROM  [SO08]  55.85,13.84 0 top
U8  74HC1G04  [SOT353]  74.93,35.68 270 top
U9  3.3V  [SOT23-5]  88.09,12.27 0 top
U10  U-BLOX_NEO-M9N  [NEO-M9N/M8T/M8U/D9S]  101.6,35.56 90 top
U11  EEPROM  [SO08]  93.85,13.84 0 top
U12  74HC1G04  [SOT353]  112.93,35.68 270 top
U13  3.3V  [SOT23-5]  39.12,123.98 180 top
U14  U-BLOX_NEO-M9N  [NEO-M9N/M8T/M8U/D9S]  25.6,100.69 270 top
U15  EEPROM  [SO08]  33.35,122.4 180 top
U16  74HC1G04  [SOT353]  14.27,100.57 90 top
U17  3.3V  [SOT23-5]  77.11,123.98 180 top
U18  U-BLOX_NEO-M9N  [NEO-M9N/M8T/M8U/D9S]  63.6,100.69 270 top
U19  EEPROM  [SO08]  71.35,122.4 180 top
U20  74HC1G04  [SOT353]  52.27,100.57 90 top
U21  3.3V  [SOT23-5]  115.11,123.98 180 top
U22  U-BLOX_NEO-M9N  [NEO-M9N/M8T/M8U/D9S]  101.6,100.69 270 top
U23  EEPROM  [SO08]  109.35,122.4 180 top
U24  74HC1G04  [SOT353]  90.27,100.57 90 top
U$1  [3V313]  27.51,60.45 180 top
U$2  [PPS13]  23.88,60.38 180 top
U$3  [FUNCTION521]  13.54,43.76 90 top
U$4  [##SAFEBOOT##882188213]  7.67,36.32 90 top
U$5  [U#BLOX11]  15.29,41.25 90 top
U$6  [NEO#M9N12]  15.21,49.2 90 top
U$7  [ANTENNA14]  14.05,57.66 90 top
U$8  74LVC4066D_QUAD_BILATERAL_SWITCH  [SO14]  27.25,13.84 180 top
U$9  [U#CENTER15]  40.12,61.41 90 top
U$10  [#I2C#18]  17.23,23.91 270 bottom
U$11  [MICROMOD_MI_LOGO_1]  13.87,34.49 90 top
U$12  [#3V3_LED#403132222514]  27.51,59.56 270 bottom
U$13  [#PPS_LED#403132222514]  23.95,59.56 270 bottom
U$14  [L1321542]  12.73,55.42 90 top
U$15  74LVC4066D_QUAD_BILATERAL_SWITCH  [SO14]  37.92,13.84 180 top
U$16  [#SPI#40313521]  11.76,22.35 180 top
U$17  [#SERIAL#I2C#40313523]  13.79,27.43 180 top
U$18  [#BUS_SELECT#509]  7.57,24.89 90 top
U$19  [#DSEL#40313522]  12.27,24.89 180 top
U$20  [#WP#13215403132222564]  17.22,19.81 270 bottom
U$21  [GNSS2222502]  11.76,40.89 90 top
U$22  [#BUS_SELECT#509]  7.57,24.89 270 bottom
U$23  [##SAFEBOOT##882188213]  7.67,36.32 270 bottom
U$24  [#SPI#40313521]  11.35,22.35 0 bottom
U$25  [#DSEL#40313522]  11.71,24.89 0 bottom
U$26  [#SERIAL#I2C#40313523]  13.39,27.43 0 bottom
U$27  [3V313]  65.51,60.45 180 top
U$28  [PPS13]  61.87,60.38 180 top
U$29  [U#BLOX11]  53.29,41.25 90 top
U$30  [NEO#M9N12]  53.21,49.2 90 top
U$31  [ANTENNA14]  52.04,57.66 90 top
U$32  [U#CENTER15]  78.11,61.41 90 top
U$33  [#I2C#18]  55.23,23.91 270 bottom
U$34  [FUNCTION521]  51.54,43.76 90 top
U$35  [MICROMOD_MI_LOGO_1]  51.87,34.49 90 top
U$36  [L1321542]  50.72,55.42 90 top
U$37  74LVC4066D_QUAD_BILATERAL_SWITCH  [SO14]  65.25,13.84 180 top
U$38  74LVC4066D_QUAD_BILATERAL_SWITCH  [SO14]  75.92,13.84 180 top
U$39  [#BUS_SELECT#509]  45.57,24.89 90 top
U$40  [#DSEL#40313522]  50.27,24.89 180 top
U$41  [#SPI#40313521]  49.76,22.35 180 top
U$42  [#SERIAL#I2C#40313523]  51.79,27.43 180 top
U$43  [#WP#13215403132222564]  55.22,19.81 270 bottom
U$44  [GNSS2222502]  49.76,40.89 90 top
U$45  [#3V3_LED#403132222514]  65.51,59.56 270 bottom
U$46  [#PPS_LED#403132222514]  61.95,59.56 270 bottom
U$47  [#BUS_SELECT#509]  45.57,24.89 270 bottom
U$48  [##SAFEBOOT##882188213]  45.67,36.32 90 top
U$49  [##SAFEBOOT##882188213]  45.67,36.32 270 bottom
U$50  [#SPI#40313521]  49.35,22.35 0 bottom
U$51  [#DSEL#40313522]  49.71,24.89 0 bottom
U$52  [#SERIAL#I2C#40313523]  51.38,27.43 0 bottom
U$53  [3V313]  103.51,60.45 180 top
U$54  [PPS13]  99.87,60.38 180 top
U$55  [U#BLOX11]  91.29,41.25 90 top
U$56  [NEO#M9N12]  91.21,49.2 90 top
U$57  [ANTENNA14]  90.04,57.66 90 top
U$58  [U#CENTER15]  116.11,61.41 90 top
U$59  [#I2C#18]  93.23,23.91 270 bottom
U$60  [FUNCTION521]  89.54,43.76 90 top
U$61  [MICROMOD_MI_LOGO_1]  89.87,34.49 90 top
U$62  [L1321542]  88.72,55.42 90 top
U$63  74LVC4066D_QUAD_BILATERAL_SWITCH  [SO14]  103.25,13.84 180 top
U$64  74LVC4066D_QUAD_BILATERAL_SWITCH  [SO14]  113.92,13.84 180 top
U$65  [#BUS_SELECT#509]  83.57,24.89 90 top
U$66  [#DSEL#40313522]  88.27,24.89 180 top
U$67  [#SPI#40313521]  87.76,22.35 180 top
U$68  [#SERIAL#I2C#40313523]  89.79,27.43 180 top
U$69  [#WP#13215403132222564]  93.22,19.81 270 bottom
U$70  [GNSS2222502]  87.76,40.89 90 top
U$71  [#3V3_LED#403132222514]  103.51,59.56 270 bottom
U$72  [#PPS_LED#403132222514]  99.95,59.56 270 bottom
U$73  [#BUS_SELECT#509]  83.57,24.89 270 bottom
U$74  [##SAFEBOOT##882188213]  83.67,36.32 90 top
U$75  [##SAFEBOOT##882188213]  83.67,36.32 270 bottom
U$76  [#SPI#40313521]  87.35,22.35 0 bottom
U$77  [#DSEL#40313522]  87.71,24.89 0 bottom
U$78  [#SERIAL#I2C#40313523]  89.38,27.43 0 bottom
U$79  [3V313]  23.7,75.79 0 top
U$80  [PPS13]  27.33,75.87 0 top
U$81  [U#BLOX11]  35.92,95 270 top
U$82  [NEO#M9N12]  35.99,87.05 270 top
U$83  [ANTENNA14]  37.16,78.59 270 top
U$84  [U#CENTER15]  11.09,74.84 270 top
U$85  [#I2C#18]  33.98,112.33 90 bottom
U$86  [FUNCTION521]  37.67,92.48 270 top
U$87  [MICROMOD_MI_LOGO_1]  37.34,101.75 270 top
U$88  [L1321542]  38.48,80.82 270 top
U$89  74LVC4066D_QUAD_BILATERAL_SWITCH  [SO14]  23.95,122.4 0 top
U$90  74LVC4066D_QUAD_BILATERAL_SWITCH  [SO14]  13.28,122.4 0 top
U$91  [#BUS_SELECT#509]  43.64,111.35 270 top
U$92  [#DSEL#40313522]  38.94,111.35 0 top
U$93  [#SPI#40313521]  39.45,113.89 0 top
U$94  [#SERIAL#I2C#40313523]  37.41,108.81 0 top
U$95  [#WP#13215403132222564]  33.99,116.43 90 bottom
U$96  [GNSS2222502]  39.45,95.35 270 top
U$97  [#3V3_LED#403132222514]  23.7,76.68 90 bottom
U$98  [#PPS_LED#403132222514]  27.25,76.68 90 bottom
U$99  [#BUS_SELECT#509]  43.64,111.35 90 bottom
U$100  [##SAFEBOOT##882188213]  43.54,99.92 270 top
U$101  [##SAFEBOOT##882188213]  43.54,99.92 90 bottom
U$102  [#SPI#40313521]  39.85,113.89 180 bottom
U$103  [#DSEL#40313522]  39.5,111.35 180 bottom
U$104  [#SERIAL#I2C#40313523]  37.82,108.81 180 bottom
U$105  [3V313]  61.7,75.79 0 top
U$106  [PPS13]  65.33,75.87 0 top
U$107  [U#BLOX11]  73.91,95 270 top
U$108  [NEO#M9N12]  73.99,87.05 270 top
U$109  [ANTENNA14]  75.16,78.59 270 top
U$110  [U#CENTER15]  49.09,74.84 270 top
U$111  [#I2C#18]  71.98,112.33 90 bottom
U$112  [FUNCTION521]  75.67,92.48 270 top
U$113  [MICROMOD_MI_LOGO_1]  75.34,101.75 270 top
U$114  [L1321542]  76.48,80.82 270 top
U$115  74LVC4066D_QUAD_BILATERAL_SWITCH  [SO14]  61.95,122.4 0 top
U$116  74LVC4066D_QUAD_BILATERAL_SWITCH  [SO14]  51.28,122.4 0 top
U$117  [#BUS_SELECT#509]  81.64,111.35 270 top
U$118  [#DSEL#40313522]  76.94,111.35 0 top
U$119  [#SPI#40313521]  77.44,113.89 0 top
U$120  [#SERIAL#I2C#40313523]  75.41,108.81 0 top
U$121  [#WP#13215403132222564]  71.98,116.43 90 bottom
U$122  [GNSS2222502]  77.44,95.35 270 top
U$123  [#3V3_LED#403132222514]  61.7,76.68 90 bottom
U$124  [#PPS_LED#403132222514]  65.25,76.68 90 bottom
U$125  [#BUS_SELECT#509]  81.64,111.35 90 bottom
U$126  [##SAFEBOOT##882188213]  81.53,99.92 270 top
U$127  [##SAFEBOOT##882188213]  81.53,99.92 90 bottom
U$128  [#SPI#40313521]  77.85,113.89 180 bottom
U$129  [#DSEL#40313522]  77.5,111.35 180 bottom
U$130  [#SERIAL#I2C#40313523]  75.82,108.81 180 bottom
U$131  [3V313]  99.7,75.79 0 top
U$132  [PPS13]  103.33,75.87 0 top
U$133  [U#BLOX11]  111.91,95 270 top
U$134  [NEO#M9N12]  111.99,87.05 270 top
U$135  [ANTENNA14]  113.16,78.59 270 top
U$136  [U#CENTER15]  87.09,74.84 270 top
U$137  [#I2C#18]  109.97,112.33 90 bottom
U$138  [FUNCTION521]  113.67,92.48 270 top
U$139  [MICROMOD_MI_LOGO_1]  113.33,101.75 270 top
U$140  [L1321542]  114.48,80.82 270 top
U$141  74LVC4066D_QUAD_BILATERAL_SWITCH  [SO14]  99.95,122.4 0 top
U$142  74LVC4066D_QUAD_BILATERAL_SWITCH  [SO14]  89.28,122.4 0 top
U$143  [#BUS_SELECT#509]  119.63,111.35 270 top
U$144  [#DSEL#40313522]  114.94,111.35 0 top
U$145  [#SPI#40313521]  115.44,113.89 0 top
U$146  [#SERIAL#I2C#40313523]  113.41,108.81 0 top
U$147  [#WP#13215403132222564]  109.98,116.43 90 bottom
U$148  [GNSS2222502]  115.44,95.35 270 top
U$149  [#3V3_LED#403132222514]  99.7,76.68 90 bottom
U$150  [#PPS_LED#403132222514]  103.25,76.68 90 bottom
U$151  [#BUS_SELECT#509]  119.63,111.35 90 bottom
U$152  [##SAFEBOOT##882188213]  119.53,99.92 270 top
U$153  [##SAFEBOOT##882188213]  119.53,99.92 90 bottom
U$154  [#SPI#40313521]  115.85,113.89 180 bottom
U$155  [#DSEL#40313522]  115.49,111.35 180 bottom
U$156  [#SERIAL#I2C#40313523]  113.82,108.81 180 bottom
WP  JUMPER-SMT_2_NO_SILK  [SMT-JUMPER_2_NO_SILK]  15.57,19.94 90 bottom
WP1  JUMPER-SMT_2_NO_SILK  [SMT-JUMPER_2_NO_SILK]  53.57,19.94 90 bottom
WP2  JUMPER-SMT_2_NO_SILK  [SMT-JUMPER_2_NO_SILK]  91.57,19.94 90 bottom
WP3  JUMPER-SMT_2_NO_SILK  [SMT-JUMPER_2_NO_SILK]  35.64,116.31 270 bottom
WP4  JUMPER-SMT_2_NO_SILK  [SMT-JUMPER_2_NO_SILK]  73.63,116.31 270 bottom
WP5  JUMPER-SMT_2_NO_SILK  [SMT-JUMPER_2_NO_SILK]  111.63,116.31 270 bottom

## Library data of the parts
B1-B6 = SparkFun-Batteries; PROD_ID: BAT-16685
C1 C12 C20 C28 C36 C44 = SparkFun-Capacitors; PROD_ID: CAP-15063
C2 C13 C21 C29 C37 C45 = SparkFun-Capacitors; PROD_ID: CAP-12416
C3 C4 C6 C9-C11 C17-C19 C25-C27 C33-C35 C41-C43 = SparkFun-Capacitors; PROD_ID: CAP-00868
C5 C7 C8 C14-C16 C22-C24 C30-C32 C38-C40 C46-C48 = SparkFun-Capacitors; PROD_ID: CAP-00810
D1 D6 D9 D12 D15 D18 = SparkFun-DiscreteSemi; PROD_ID: DIO-15359
D2 D4 D7 D10 D13 D16 = SparkFun-DiscreteSemi; PROD_ID: DIO-10955
D3 D5 D8 D11 D14 D17 = SparkFun-IC-Power; PROD_ID: DIO-14084
E1-E6 = SparkFun-Connectors; PROD_ID: CONN-09193; SF_ID: WRL-09144
E$1-E$4 FD1-FD24 LOGO1-LOGO12 = SparkFun-Aesthetics
E$5 E$6 = SparkFun-Retired
FB1-FB6 = SparkFun-Coils; MFG_PART: BLM15HB121SN1D; PROD_ID: NDUC-14206
J1 J6 J10 J14 J18 J22 U$11 U$35 U$61 U$87 U$113 U$139 = SparkFun-MicroMod
J2 J4 J7 J8 J11 J12 J15 J16 J19 J20 J23 J24 TP1-TP6 = SparkFun-Connectors
J3 J5 J9 J13 J17 J21 = SparkFun-Connectors; PROD_ID: CONN-14122
JP1-JP6 PPS PPS1-PPS5 PWR\ PWR\1-PWR\5 WP WP1-WP5 = SparkFun-Jumpers
LED1 LED3 LED5 LED7 LED9 LED11 = SparkFun-LED; PROD_ID: DIO-08575
LED2 LED4 LED6 LED8 LED10 LED12 = SparkFun-LED; PROD_ID: DIO-00819
R1 R11 R20 R21 R36 R37 R52 R53 R68 R69 R84 R85 = SparkFun-Resistors; PROD_ID: RES-07856
R2 R6 R16 R28 R31 R32 R44 R47 R48 R60 R63 R64 R76 R79 R80 R92 R95 R96 = SparkFun-Resistors; PROD_ID: RES-00824
R3 R4 R29 R30 R45 R46 R61 R62 R77 R78 R93 R94 = SparkFun-Resistors; PROD_ID: RES-12083
R5 R19 R35 R51 R67 R83 = SparkFun-Resistors; PROD_ID: RES-07851
R7 R8 R17 R18 R33 R34 R49 R50 R65 R66 R81 R82 = SparkFun-Resistors; PROD_ID: RES-08272
R9 R10 R22 R23 R38 R39 R54 R55 R70 R71 R86 R87 = SparkFun-Resistors; PROD_ID: RES-09334
R12 R15 R24 R26 R40 R42 R56 R58 R72 R74 R88 R90 = SparkFun-Resistors; PROD_ID: RES-07828
R13 R27 R43 R59 R75 R91 = SparkFun-Resistors; PROD_ID: RES-15081
R14 R25 R41 R57 R73 R89 = SparkFun-Resistors; PROD_ID: RES-14883
U1 U6 U10 U14 U18 U22 = SparkFun-GPS; PROD_ID: IC-14651
U2 U5 U9 U13 U17 U21 = SparkFun-IC-Power; PROD_ID: VREG-12457
U3 U7 U11 U15 U19 U23 = SparkFun-IC-Memory; PROD_ID: IC-14645
U4 U8 U12 U16 U20 U24 = SparkFun-IC-Logic; PROD_ID: COMP-08268
U$1-U$3 U$5-U$7 U$9 U$10 U$12-U$14 U$16-U$22 U$24-U$34 U$36 U$39-U$47 U$50-U$60 U$62 U$65-U$73 U$76-U$86 U$88 U$91-U$99 U$102-U$112 U$114 U$117-U$125 U$128-U$138 U$140 U$143-U$151 U$154-U$156 = top
U$4 U$23 U$48 U$49 U$74 U$75 U$100 U$101 U$126 U$127 U$152 U$153 = neom9n
U$8 U$15 U$37 U$38 U$63 U$64 U$89 U$90 U$115 U$116 U$141 U$142 = SparkFun-IC-Logic; PROD_ID: IC-13944

## Nets
3.3V [3.3V]: C2.1 C4.1 C5.1 C7.1 C8.1 D2.A JP5.2 PWR\.2 R2.2 R6.2 R15.2 R16.2 U1.7 U1.23 U2.5 U3.8 U4.5 U$8.14 U$15.14
3.3V1 [3.3V]: C10.1 C13.1 C14.1 C15.1 C16.1 D4.A JP1.2 PWR\1.2 R24.2 R28.2 R31.2 R32.2 U5.5 U6.7 U6.23 U7.8 U8.5 U$37.14 U$38.14
3.3V2 [3.3V]: C18.1 C21.1 C22.1 C23.1 C24.1 D7.A JP2.2 PWR\2.2 R40.2 R44.2 R47.2 R48.2 U9.5 U10.7 U10.23 U11.8 U12.5 U$63.14 U$64.14
3.3V3 [3.3V]: C26.1 C29.1 C30.1 C31.1 C32.1 D10.A JP3.2 PWR\3.2 R56.2 R60.2 R63.2 R64.2 U13.5 U14.7 U14.23 U15.8 U16.5 U$89.14 U$90.14
3.3V4 [3.3V]: C34.1 C37.1 C38.1 C39.1 C40.1 D13.A JP4.2 PWR\4.2 R72.2 R76.2 R79.2 R80.2 U17.5 U18.7 U18.23 U19.8 U20.5 U$115.14 U$116.14
3.3V5 [3.3V]: C42.1 C45.1 C46.1 C47.1 C48.1 D16.A JP6.2 PWR\5.2 R88.2 R92.2 R95.2 R96.2 U21.5 U22.7 U22.23 U23.8 U24.5 U$141.14 U$142.14
!RESET: J1.51 U1.8
!RESET1: J6.51 U6.8
!RESET2: J10.51 U10.8
!RESET3: J14.51 U14.8
!RESET4: J18.51 U18.8
!RESET5: J22.51 U22.8
!SAFE: J2.2 R2.1 U1.1
!SAFE1: J7.2 R28.1 U6.1
!SAFE2: J11.2 R44.1 U10.1
!SAFE3: J15.2 R60.1 U14.1
!SAFE4: J19.2 R76.1 U18.1
!SAFE5: J23.2 R92.1 U22.1
A0: J1.36 U3.1
A1: J1.34 U3.2
A2: J1.32 U3.3
A3: J6.36 U7.1
A4: J6.32 U7.3
A5: J6.34 U7.2
A6: J10.36 U11.1
A7: J10.32 U11.3
A8: J10.34 U11.2
A9: J14.36 U15.1
A10: J14.32 U15.3
A11: J14.34 U15.2
A12: J18.36 U19.1
A13: J18.32 U19.3
A14: J18.34 U19.2
A15: J22.36 U23.1
A16: J22.32 U23.3
A17: J22.34 U23.2
D+: D3.4 R9.1
D+1: D5.4 R22.1
D+2: D8.4 R38.1
D+3: D11.4 R54.1
D+4: D14.4 R70.1
D+5: D17.4 R86.1
D-: D3.6 R10.1
D-1: D5.6 R23.1
D-2: D8.6 R39.1
D-3: D11.6 R55.1
D-4: D14.6 R71.1
D-5: D17.6 R87.1
D_SEL: J4.2 U1.2 U4.2 U$8.5 U$8.6 U$8.12 U$8.13
D_SEL1: J8.2 U6.2 U8.2 U$37.5 U$37.6 U$37.12 U$37.13
D_SEL2: J12.2 U10.2 U12.2 U$63.5 U$63.6 U$63.12 U$63.13
D_SEL3: J16.2 U14.2 U16.2 U$89.5 U$89.6 U$89.12 U$89.13
D_SEL4: J20.2 U18.2 U20.2 U$115.5 U$115.6 U$115.12 U$115.13
D_SEL5: J24.2 U22.2 U24.2 U$141.5 U$141.6 U$141.12 U$141.13
EN: J1.71 R12.1 U2.3
EN1: J6.71 R26.1 U5.3
EN2: J10.71 R42.1 U9.3
EN3: J14.71 R58.1 U13.3
EN4: J18.71 R74.1 U17.3
EN5: J22.71 R90.1 U21.3
GND: B1.- C1.2 C2.2 C3.2 C4.2 C5.2 C6.2 C7.2 C8.2 D1.1 D3.2 E1.1 E1.2 J1.1 J1.33 J1.39 J1.45 J1.75 J1.GND1 J1.GND2 J1.GND3 J1.GND4 J1.GND5 J1.GND6 J2.1 J3.GND J3.GND2 J4.3 LED1.C LED2.C R3.1 R4.1 R15.1 U1.10 U1.12 U1.13 U1.24 U2.2 U3.4 U4.3 U$8.7 U$15.7 WP.1
GND1: B2.- C9.2 C10.2 C11.2 C12.2 C13.2 C14.2 C15.2 C16.2 D5.2 D6.1 E2.1 E2.2 J5.GND J5.GND2 J6.1 J6.33 J6.39 J6.45 J6.75 J6.GND1 J6.GND2 J6.GND3 J6.GND4 J6.GND5 J6.GND6 J7.1 J8.3 LED3.C LED4.C R24.1 R29.1 R30.1 U5.2 U6.10 U6.12 U6.13 U6.24 U7.4 U8.3 U$37.7 U$38.7 WP1.1
GND2: B3.- C17.2 C18.2 C19.2 C20.2 C21.2 C22.2 C23.2 C24.2 D8.2 D9.1 E3.1 E3.2 J9.GND J9.GND2 J10.1 J10.33 J10.39 J10.45 J10.75 J10.GND1 J10.GND2 J10.GND3 J10.GND4 J10.GND5 J10.GND6 J11.1 J12.3 LED5.C LED6.C R40.1 R45.1 R46.1 U9.2 U10.10 U10.12 U10.13 U10.24 U11.4 U12.3 U$63.7 U$64.7 WP2.1
GND3: B4.- C25.2 C26.2 C27.2 C28.2 C29.2 C30.2 C31.2 C32.2 D11.2 D12.1 E4.1 E4.2 J13.GND J13.GND2 J14.1 J14.33 J14.39 J14.45 J14.75 J14.GND1 J14.GND2 J14.GND3 J14.GND4 J14.GND5 J14.GND6 J15.1 J16.3 LED7.C LED8.C R56.1 R61.1 R62.1 U13.2 U14.10 U14.12 U14.13 U14.24 U15.4 U16.3 U$89.7 U$90.7 WP3.1
GND4: B5.- C33.2 C34.2 C35.2 C36.2 C37.2 C38.2 C39.2 C40.2 D14.2 D15.1 E5.1 E5.2 J17.GND J17.GND2 J18.1 J18.33 J18.39 J18.45 J18.75 J18.GND1 J18.GND2 J18.GND3 J18.GND4 J18.GND5 J18.GND6 J19.1 J20.3 LED9.C LED10.C R72.1 R77.1 R78.1 U17.2 U18.10 U18.12 U18.13 U18.24 U19.4 U20.3 U$115.7 U$116.7 WP4.1
GND5: B6.- C41.2 C42.2 C43.2 C44.2 C45.2 C46.2 C47.2 C48.2 D17.2 D18.1 E6.1 E6.2 J21.GND J21.GND2 J22.1 J22.33 J22.39 J22.45 J22.75 J22.GND1 J22.GND2 J22.GND3 J22.GND4 J22.GND5 J22.GND6 J23.1 J24.3 LED11.C LED12.C R88.1 R93.1 R94.1 U21.2 U22.10 U22.12 U22.13 U22.24 U23.4 U24.3 U$141.7 U$142.7 WP5.1
GPS_ANT1 [Antenna]: D1.2 E1.FEED FB1.1 U1.11
GPS_ANT2 [Antenna]: D6.2 E2.FEED FB2.1 U6.11
GPS_ANT3 [Antenna]: D9.2 E3.FEED FB3.1 U10.11
GPS_ANT4 [Antenna]: D12.2 E4.FEED FB4.1 U14.11
GPS_ANT5 [Antenna]: D15.2 E5.FEED FB5.1 U18.11
GPS_ANT6 [Antenna]: D18.2 E6.FEED FB6.1 U22.11
INT: J1.53 U1.4
INT1: J6.53 U6.4
INT2: J10.53 U10.4
INT3: J14.53 U14.4
INT4: J18.53 U18.4
INT5: J22.53 U22.4
INV_D_SEL: U4.4 U$15.5 U$15.6 U$15.12 U$15.13
INV_D_SEL1: U8.4 U$38.5 U$38.6 U$38.12 U$38.13
INV_D_SEL2: U12.4 U$64.5 U$64.6 U$64.12 U$64.13
INV_D_SEL3: U16.4 U$90.5 U$90.6 U$90.12 U$90.13
INV_D_SEL4: U20.4 U$116.5 U$116.6 U$116.12 U$116.13
INV_D_SEL5: U24.4 U$142.5 U$142.6 U$142.12 U$142.13
N$1: PWR\.1 R1.2
N$2: LED1.A R11.1
N$3: C1.1 FB1.2 R14.1
N$4: PPS.1 R11.2
N$5: JP5.1 R8.2
N$6: D2.C R5.2
N$7: J3.A5 R4.2
N$8: JP5.3 R7.2
N$9: J3.B5 R3.2
N$10: LED2.A R1.1
N$11: R9.2 U1.6
N$12: R10.2 U1.5
N$13 [3.3V]: J4.1 R6.1
N$14: JP1.1 R18.2
N$15: JP1.3 R17.2
N$16: LED3.A R20.1
N$17: PPS1.1 R20.2
N$18: D4.C R19.2
N$19: LED4.A R21.1
N$20: R22.2 U6.6
N$21: R23.2 U6.5
N$22: PWR\1.1 R21.2
N$23: C12.1 FB2.2 R25.1
N$24: J5.A5 R30.2
N$25: J5.B5 R29.2
N$26 [3.3V]: J8.1 R31.1
N$27: JP2.1 R34.2
N$28: JP2.3 R33.2
N$29: LED5.A R36.1
N$30: PPS2.1 R36.2
N$31: D7.C R35.2
N$32: LED6.A R37.1
N$33: R38.2 U10.6
N$34: R39.2 U10.5
N$35: PWR\2.1 R37.2
N$36: C20.1 FB3.2 R41.1
N$37: J9.A5 R46.2
N$38: J9.B5 R45.2
N$39 [3.3V]: J12.1 R47.1
N$40: JP3.1 R50.2
N$41: JP3.3 R49.2
N$42: LED7.A R52.1
N$43: PPS3.1 R52.2
N$44: D10.C R51.2
N$45: LED8.A R53.1
N$46: R54.2 U14.6
N$47: R55.2 U14.5
N$48: PWR\3.1 R53.2
N$49: C28.1 FB4.2 R57.1
N$50: J13.A5 R62.2
N$51: J13.B5 R61.2
N$52 [3.3V]: J16.1 R63.1
N$53: JP4.1 R66.2
N$54: JP4.3 R65.2
N$55: LED9.A R68.1
N$56: PPS4.1 R68.2
N$57: D13.C R67.2
N$58: LED10.A R69.1
N$59: R70.2 U18.6
N$60: R71.2 U18.5
N$61: PWR\4.1 R69.2
N$62: C36.1 FB5.2 R73.1
N$63: J17.A5 R78.2
N$64: J17.B5 R77.2
N$65 [3.3V]: J20.1 R79.1
N$66: JP6.1 R82.2
N$67: JP6.3 R81.2
N$68: LED11.A R84.1
N$69: PPS5.1 R84.2
N$70: D16.C R83.2
N$71: LED12.A R85.1
N$72: R86.2 U22.6
N$73: R87.2 U22.5
N$74: PWR\5.1 R85.2
N$75: C44.1 FB6.2 R89.1
N$76: J21.A5 R94.2
N$77: J21.B5 R93.2
N$78 [3.3V]: J24.1 R95.1
PICO: J1.5 U$15.10
PICO1: J6.5 U$38.10
PICO2: J10.5 U$64.10
PICO3: J14.5 U$90.10
PICO4: J18.5 U$116.10
PICO5: J22.5 U$142.10
POCI: J1.7 U$15.9
POCI1: J6.7 U$38.9
POCI2: J10.7 U$64.9
POCI3: J14.7 U$90.9
POCI4: J18.7 U$116.9
POCI5: J22.7 U$142.9
PPS: J1.47 PPS.2 U1.3
PPS1: J6.47 PPS1.2 U6.3
PPS2: J10.47 PPS2.2 U10.3
PPS3: J14.47 PPS3.2 U14.3
PPS4: J18.47 PPS4.2 U18.3
PPS5: J22.47 PPS5.2 U22.3
RXI: J1.15 U$8.10
RXI1: J6.15 U$37.10
RXI2: J10.15 U$63.10
RXI3: J14.15 U$89.10
RXI4: J18.15 U$115.10
RXI5: J22.15 U$141.10
RXI/PICO: R13.P8 U$8.11 U$15.11
RXI/PICO1: R27.P8 U$37.11 U$38.11
RXI/PICO2: R43.P8 U$63.11 U$64.11
RXI/PICO3: R59.P8 U$89.11 U$90.11
RXI/PICO4: R75.P8 U$115.11 U$116.11
RXI/PICO5: R91.P8 U$141.11 U$142.11
RXLV: R13.P1 U1.21
RXLV1: R27.P1 U6.21
RXLV2: R43.P1 U10.21
RXLV3: R59.P1 U14.21
RXLV4: R75.P1 U18.21
RXLV5: R91.P1 U22.21
SCK: J1.3 U$15.3
SCK1: J6.3 U$38.3
SCK2: J10.3 U$64.3
SCK3: J14.3 U$90.3
SCK4: J18.3 U$116.3
SCK5: J22.3 U$142.3
SCL: J1.21 R7.1 U3.6 U$8.3
SCL1: J6.21 R17.1 U7.6 U$37.3
SCL2: J10.21 R33.1 U11.6 U$63.3
SCL3: J14.21 R49.1 U15.6 U$89.3
SCL4: J18.21 R65.1 U19.6 U$115.3
SCL5: J22.21 R81.1 U23.6 U$141.3
SCL/SCK: R13.P6 U$8.4 U$15.4
SCL/SCK1: R27.P6 U$37.4 U$38.4
SCL/SCK2: R43.P6 U$63.4 U$64.4
SCL/SCK3: R59.P6 U$89.4 U$90.4
SCL/SCK4: R75.P6 U$115.4 U$116.4
SCL/SCK5: R91.P6 U$141.4 U$142.4
SCL_LV: R13.P3 U1.19
SCL_LV1: R27.P3 U6.19
SCL_LV2: R43.P3 U10.19
SCL_LV3: R59.P3 U14.19
SCL_LV4: R75.P3 U18.19
SCL_LV5: R91.P3 U22.19
SDA: J1.19 R8.1 U3.5 U$8.2
SDA1: J6.19 R18.1 U7.5 U$37.2
SDA2: J10.19 R34.1 U11.5 U$63.2
SDA3: J14.19 R50.1 U15.5 U$89.2
SDA4: J18.19 R66.1 U19.5 U$115.2
SDA5: J22.19 R82.1 U23.5 U$141.2
SDA/SPI_!CS!: R13.P5 U$8.1 U$15.1
SDA/SPI_!CS!1: R27.P5 U$37.1 U$38.1
SDA/SPI_!CS!2: R43.P5 U$63.1 U$64.1
SDA/SPI_!CS!3: R59.P5 U$89.1 U$90.1
SDA/SPI_!CS!4: R75.P5 U$115.1 U$116.1
SDA/SPI_!CS!5: R91.P5 U$141.1 U$142.1
SDA_LV: R13.P4 U1.18
SDA_LV1: R27.P4 U6.18
SDA_LV2: R43.P4 U10.18
SDA_LV3: R59.P4 U14.18
SDA_LV4: R75.P4 U18.18
SDA_LV5: R91.P4 U22.18
SHLD: J3.SHLD1 J3.SHLD2 J3.SHLD3 J3.SHLD4
SHLD1: J5.SHLD1 J5.SHLD2 J5.SHLD3 J5.SHLD4
SHLD2: J9.SHLD1 J9.SHLD2 J9.SHLD3 J9.SHLD4
SHLD3: J13.SHLD1 J13.SHLD2 J13.SHLD3 J13.SHLD4
SHLD4: J17.SHLD1 J17.SHLD2 J17.SHLD3 J17.SHLD4
SHLD5: J21.SHLD1 J21.SHLD2 J21.SHLD3 J21.SHLD4
SPI_!CS!: J1.49 U$15.2
SPI_!CS!1: J6.49 U$38.2
SPI_!CS!2: J10.49 U$64.2
SPI_!CS!3: J14.49 U$90.2
SPI_!CS!4: J18.49 U$116.2
SPI_!CS!5: J22.49 U$142.2
TXLV: R13.P2 U1.20
TXLV1: R27.P2 U6.20
TXLV2: R43.P2 U10.20
TXLV3: R59.P2 U14.20
TXLV4: R75.P2 U18.20
TXLV5: R91.P2 U22.20
TXO: J1.13 U$8.9
TXO1: J6.13 U$37.9
TXO2: J10.13 U$63.9
TXO3: J14.13 U$89.9
TXO4: J18.13 U$115.9
TXO5: J22.13 U$141.9
TXO/POCI: R13.P7 U$8.8 U$15.8
TXO/POCI1: R27.P7 U$37.8 U$38.8
TXO/POCI2: R43.P7 U$63.8 U$64.8
TXO/POCI3: R59.P7 U$89.8 U$90.8
TXO/POCI4: R75.P7 U$115.8 U$116.8
TXO/POCI5: R91.P7 U$141.8 U$142.8
USB_D+: D3.3 J3.A6 J3.B6
USB_D+1: D5.3 J5.A6 J5.B6
USB_D+2: D8.3 J9.A6 J9.B6
USB_D+3: D11.3 J13.A6 J13.B6
USB_D+4: D14.3 J17.A6 J17.B6
USB_D+5: D17.3 J21.A6 J21.B6
USB_D-: D3.1 J3.A7 J3.B7
USB_D-1: D5.1 J5.A7 J5.B7
USB_D-2: D8.1 J9.A7 J9.B7
USB_D-3: D11.1 J13.A7 J13.B7
USB_D-4: D14.1 J17.A7 J17.B7
USB_D-5: D17.1 J21.A7 J21.B7
V_BATT: B1.+ C3.1 R5.1 TP1.1 U1.22
V_BATT1: B2.+ C9.1 R19.1 TP2.1 U6.22
V_BATT2: B3.+ C17.1 R35.1 TP3.1 U10.22
V_BATT3: B4.+ C25.1 R51.1 TP4.1 U14.22
V_BATT4: B5.+ C33.1 R67.1 TP5.1 U18.22
V_BATT5: B6.+ C41.1 R83.1 TP6.1 U22.22
V_USB: D3.5 J3.VBUS1 J3.VBUS2
V_USB1: D5.5 J5.VBUS1 J5.VBUS2
V_USB2: D8.5 J9.VBUS1 J9.VBUS2
V_USB3: D11.5 J13.VBUS1 J13.VBUS2
V_USB4: D14.5 J17.VBUS1 J17.VBUS2
V_USB5: D17.5 J21.VBUS1 J21.VBUS2
VCC: C6.1 J1.72 J1.74 R12.2 U2.1
VCC1: C11.1 J6.72 J6.74 R26.2 U5.1
VCC2: C19.1 J10.72 J10.74 R42.2 U9.1
VCC3: C27.1 J14.72 J14.74 R58.2 U13.1
VCC4: C35.1 J18.72 J18.74 R74.2 U17.1
VCC5: C43.1 J22.72 J22.74 R90.2 U21.1
VCC_RF: R14.2 U1.9
VCC_RF1: R25.2 U6.9
VCC_RF2: R41.2 U10.9
VCC_RF3: R57.2 U14.9
VCC_RF4: R73.2 U18.9
VCC_RF5: R89.2 U22.9
WP: J1.40 R16.1 U3.7 WP.2
WP1: J6.40 R32.1 U7.7 WP1.2
WP2: J10.40 R48.1 U11.7 WP2.2
WP3: J14.40 R64.1 U15.7 WP3.2
WP4: J18.40 R80.1 U19.7 WP4.2
WP5: J22.40 R96.1 U23.7 WP5.2

## Tracks (layer width: path | path; a pad name or v marks a point on that pad's centre or on a via)
3.3V  (via drill 0.3)  (1 unrouted)
  Top 0.203: v28.03,60.38 27.65,60 25.53,60 24.64,59.11 24.64,48.39 26.92,46.11 26.92,44.89 26.74,44.7 v26.34,44.7
  Top 0.254: 11.14,14.78 12.25,15.89 | R16.2 C8.1 15.23,18.38 15.95,17.65 U3.8 15.96,16.63 v15.96,15.53
  Top 0.305: U1.23 C2.1 31.5,26.65 32.37,25.78 D2.A 33.93,25.78 35.4,27.25 v35.41,27.25 | U1.7 25.91,41.66 R15.2 25.91,44.27 v26.34,44.7 | v40.21,12.7 41.1,11.81 U$15.14 41.1,9.44 C7.1 | U2.5 11.14,14.78 | v30.43,12.7 U$8.14 30.43,9.06 C5.1 | v12.28,23.91 12.28,29.74 11.05,30.96 8.65,30.96 8.6,30.91 | U4.5 37.07,36.33 v37.06,36.31 | R2.2 8.6,32 8.6,30.91 | 8.6,30.91 R6.2 | 12.25,15.89 v12.31,15.89
  Bottom 0.203: PWR\.2 v28.03,60.38
  Bottom 0.305: v26.34,44.7 34.9,44.7 35.38,44.22 35.38,36.31 35.41,36.31 | v40.21,12.7 35.76,12.7 | 35.76,12.7 35.41,12.7 | 35.41,12.7 35.03,12.7 | 35.03,12.7 v30.43,12.7 17.45,12.7 15.96,14.19 v15.96,15.53 12.68,15.53 v12.31,15.89 12.28,15.92 v12.28,23.91 12.32,23.88 JP5.2 | 35.41,36.31 v35.41,27.25 35.41,13.08 | 35.41,13.05 35.41,12.7 | v37.06,36.31 35.41,36.31 | 35.03,12.7 35.41,13.08 | 35.76,12.7 35.41,13.05 | 35.41,13.05 35.41,13.08
  pour Top (isolate 0.305, no thermals): 9.09,13.03 11.4,13.03 11.4,14.12 9.09,14.12
3.3V1  (via drill 0.3)  (1 unrouted)
  Top 0.203: v66.03,60.38 65.65,60 63.53,60 62.64,59.11 62.64,48.39 64.92,46.11 64.92,44.89 64.74,44.7 v64.34,44.7
  Top 0.254: 49.14,14.78 50.25,15.89 | R32.2 C16.1 53.23,18.38 53.95,17.65 U7.8 53.96,16.63 v53.96,15.53
  Top 0.305: U6.23 C13.1 69.5,26.65 70.37,25.78 D4.A 71.93,25.78 v73.4,27.25 v73.41,27.25 | U6.7 63.91,41.66 R24.2 63.91,44.27 v64.34,44.7 | v78.21,12.7 79.1,11.81 U$38.14 79.1,9.44 C15.1 | U5.5 49.14,14.78 | v68.43,12.7 U$37.14 68.43,9.06 C14.1 | v50.28,23.91 50.28,29.74 49.05,30.96 46.65,30.96 46.6,30.91 | U8.5 75.07,36.33 v75.06,36.31 | R28.2 46.6,32 46.6,30.91 | 46.6,30.91 R31.2 | 50.25,15.89 v50.31,15.89
  Bottom 0.203: PWR\1.2 v66.03,60.38
  Bottom 0.305: v64.34,44.7 72.9,44.7 73.38,44.22 73.38,36.31 73.41,36.31 | v78.21,12.7 73.76,12.7 | 73.76,12.7 73.41,12.7 | 73.41,12.7 73.03,12.7 | 73.03,12.7 v68.43,12.7 55.45,12.7 53.96,14.19 v53.96,15.53 50.67,15.53 v50.31,15.89 50.28,15.92 v50.28,23.91 50.32,23.88 JP1.2 | 73.41,36.31 v73.41,27.25 73.41,13.08 | 73.41,13.05 73.41,12.7 | v75.06,36.31 73.41,36.31 | 73.03,12.7 73.41,13.08 | 73.76,12.7 73.41,13.05 | 73.41,13.05 73.41,13.08
  pour Top (isolate 0.305, no thermals): 47.09,13.03 49.4,13.03 49.4,14.12 47.09,14.12
3.3V2  (via drill 0.3)  (1 unrouted)
  Top 0.203: v104.03,60.38 103.65,60 101.53,60 100.64,59.11 100.64,48.39 102.92,46.11 102.92,44.89 102.73,44.7 v102.34,44.7
  Top 0.254: 87.14,14.78 88.25,15.89 | R48.2 C24.1 91.23,18.38 91.95,17.65 U11.8 v91.96,15.53
  Top 0.305: U10.23 C21.1 107.5,26.65 108.37,25.78 D7.A 109.93,25.78 111.4,27.25 v111.41,27.25 | U10.7 101.91,41.66 R40.2 101.91,44.27 v102.34,44.7 | v116.2,12.7 117.09,11.81 U$64.14 117.09,9.44 C23.1 | U9.5 87.14,14.78 | v106.43,12.7 U$63.14 106.43,9.06 C22.1 | v88.28,23.91 88.28,29.74 87.05,30.96 84.65,30.96 84.6,30.91 | U12.5 113.07,36.33 v113.06,36.31 | R44.2 84.6,32 84.6,30.91 | 84.6,30.91 R47.2 | 88.25,15.89 v88.31,15.89
  Bottom 0.203: PWR\2.2 v104.03,60.38
  Bottom 0.305: v102.34,44.7 110.9,44.7 111.38,44.22 111.38,36.31 111.41,36.31 | v116.2,12.7 111.76,12.7 | 111.76,12.7 111.41,12.7 | 111.41,12.7 111.03,12.7 | 111.03,12.7 v106.43,12.7 93.45,12.7 91.96,14.19 v91.96,15.53 88.67,15.53 v88.31,15.89 88.28,15.92 v88.28,23.91 88.32,23.88 JP2.2 | 111.41,36.31 v111.41,27.25 111.41,13.08 | 111.41,13.05 111.41,12.7 | v113.06,36.31 111.41,36.31 | 111.03,12.7 111.41,13.08 | 111.76,12.7 111.41,13.05 | 111.41,13.05 111.41,13.08
  pour Top (isolate 0.305, no thermals): 85.09,13.03 87.4,13.03 87.4,14.12 85.09,14.12
3.3V3  (via drill 0.3)  (1 unrouted)
  Top 0.203: v23.18,75.87 23.55,76.25 25.67,76.25 26.56,77.14 26.56,87.86 24.28,90.14 24.28,91.36 24.47,91.54 v24.87,91.54
  Top 0.254: 40.07,121.46 38.96,120.35 | R64.2 C32.1 35.98,117.87 35.25,118.59 U15.8 35.24,119.61 v35.24,120.72
  Top 0.305: U14.23 C29.1 19.7,109.6 18.83,110.47 D10.A 17.27,110.47 v15.81,109 v15.79,109 | U14.7 25.3,94.59 R56.2 25.3,91.97 v24.87,91.54 | v11,123.55 10.11,124.44 U$90.14 10.11,126.81 C31.1 | U13.5 40.07,121.46 | v20.78,123.55 U$89.14 20.78,127.19 C30.1 | v38.93,112.33 38.93,106.51 40.15,105.28 42.55,105.28 42.6,105.33 | U16.5 14.13,99.92 v14.15,99.93 | R60.2 42.6,104.25 42.6,105.33 | 42.6,105.33 R63.2 | 38.96,120.35 v38.89,120.35
  Bottom 0.203: PWR\3.2 v23.18,75.87
  Bottom 0.305: v24.87,91.54 16.31,91.54 15.82,92.02 15.82,99.93 15.79,99.93 | v11,123.55 15.44,123.55 | 15.44,123.55 15.79,123.55 | 15.79,123.55 16.17,123.55 | 16.17,123.55 v20.78,123.55 33.75,123.55 35.24,122.05 v35.24,120.72 38.53,120.72 v38.89,120.35 38.92,120.32 v38.92,112.33 v38.93,112.33 38.89,112.37 JP3.2 | 15.79,99.93 v15.79,109 15.79,123.17 | 15.79,123.2 15.79,123.55 | v14.15,99.93 15.79,99.93 | 16.17,123.55 15.79,123.17 | 15.44,123.55 15.79,123.2 | 15.79,123.2 15.79,123.17
  pour Top (isolate 0.305, no thermals): 42.11,123.22 39.8,123.22 39.8,122.12 42.11,122.12
3.3V4  (via drill 0.3)  (1 unrouted)
  Top 0.203: v61.18,75.87 61.55,76.25 63.67,76.25 64.56,77.14 64.56,87.86 62.28,90.14 62.28,91.36 62.47,91.54 v62.86,91.54
  Top 0.254: 78.06,121.46 76.95,120.35 | R80.2 C40.1 73.98,117.87 73.25,118.59 U19.8 73.24,119.61 v73.24,120.72
  Top 0.305: U18.23 C37.1 57.7,109.6 56.83,110.47 D13.A 55.27,110.47 53.81,109 v53.79,109 | U18.7 63.3,94.59 R72.2 63.3,91.97 v62.86,91.54 | v49,123.55 48.11,124.44 U$116.14 48.11,126.81 C39.1 | U17.5 78.06,121.46 | v58.78,123.55 U$115.14 58.78,127.19 C38.1 | v76.92,112.33 76.92,106.51 78.15,105.28 80.55,105.28 80.6,105.33 | U20.5 52.13,99.92 v52.14,99.93 | R76.2 80.6,104.25 80.6,105.33 | 80.6,105.33 R79.2 | 76.95,120.35 v76.89,120.35
  Bottom 0.203: PWR\4.2 v61.18,75.87
  Bottom 0.305: v62.86,91.54 54.3,91.54 53.82,92.02 53.82,99.93 53.79,99.93 | v49,123.55 53.44,123.55 | 53.44,123.55 53.79,123.55 | 53.79,123.55 54.17,123.55 | 54.17,123.55 v58.78,123.55 71.75,123.55 73.24,122.05 v73.24,120.72 76.53,120.72 v76.89,120.35 76.92,120.32 v76.92,112.33 76.89,112.37 JP4.2 | 53.79,99.93 v53.79,109 53.79,123.17 | 53.79,123.2 53.79,123.55 | v52.14,99.93 53.79,99.93 | 54.17,123.55 53.79,123.17 | 53.44,123.55 53.79,123.2 | 53.79,123.2 53.79,123.17
  pour Top (isolate 0.305, no thermals): 80.11,123.22 77.8,123.22 77.8,122.12 80.11,122.12
3.3V5  (via drill 0.3)  (1 unrouted)
  Top 0.203: v99.17,75.87 99.55,76.25 101.67,76.25 102.56,77.14 102.56,87.86 100.28,90.14 100.28,91.36 100.47,91.54 v100.86,91.54
  Top 0.254: 116.06,121.46 114.95,120.35 | R96.2 C48.1 111.98,117.87 111.25,118.59 U23.8 111.24,119.61 v111.24,120.72
  Top 0.305: U22.23 C45.1 95.7,109.6 94.83,110.47 D16.A 93.27,110.47 91.8,109 v91.79,109 | U22.7 101.3,94.59 R88.2 101.3,91.97 v100.86,91.54 | v87,123.55 86.11,124.44 U$142.14 86.11,126.81 C47.1 | U21.5 116.06,121.46 | v96.77,123.55 U$141.14 96.77,127.19 C46.1 | v114.92,112.33 114.92,106.51 116.15,105.28 118.55,105.28 118.6,105.33 | U24.5 90.13,99.92 v90.14,99.93 | R92.2 118.6,104.25 118.6,105.33 | 118.6,105.33 R95.2 | 114.95,120.35 v114.89,120.35
  Bottom 0.203: PWR\5.2 v99.17,75.87
  Bottom 0.305: v100.86,91.54 92.3,91.54 91.82,92.02 91.82,99.93 91.79,99.93 | v87,123.55 91.44,123.55 | 91.44,123.55 91.79,123.55 | 91.79,123.55 92.17,123.55 | 92.17,123.55 v96.77,123.55 109.75,123.55 111.24,122.05 v111.24,120.72 114.53,120.72 v114.89,120.35 114.92,120.32 v114.92,112.33 114.88,112.37 JP6.2 | 91.79,99.93 v91.79,109 91.79,123.17 | 91.79,123.2 91.79,123.55 | v90.14,99.93 91.79,99.93 | 92.17,123.55 91.79,123.17 | 91.44,123.55 91.79,123.2 | 91.79,123.2 91.79,123.17
  pour Top (isolate 0.305, no thermals): 118.11,123.22 115.8,123.22 115.8,122.12 118.11,122.12
!RESET
  Top 0.203: J1.51 22.35,9.26 20.88,10.73 20.88,21.22 24.52,24.86 24.52,40.04 U1.8
!RESET1
  Top 0.203: J6.51 60.35,9.26 58.88,10.73 58.88,21.22 62.52,24.86 62.52,40.04 U6.8
!RESET2
  Top 0.203: J10.51 98.35,9.26 96.88,10.73 96.88,21.22 100.52,24.86 100.52,40.04 U10.8
!RESET3
  Top 0.203: J14.51 28.85,126.99 30.32,125.52 30.32,115.03 26.68,111.39 26.68,96.21 U14.8
!RESET4
  Top 0.203: J18.51 66.85,126.99 68.32,125.52 68.32,115.03 64.68,111.39 64.68,96.21 U18.8
!RESET5
  Top 0.203: J22.51 104.85,126.99 106.32,125.52 106.32,115.03 102.68,111.39 102.68,96.21 U22.8
!SAFE  (via drill 0.3)
  Top 0.203: U1.1 32.6,40.4 31.03,38.83 27.45,38.83 25.3,36.68 25.3,27.95 v25.44,27.81 | v23.96,27.77 23.96,25.4 23.2,24.64 19.38,24.64 17.73,26.29 14.17,26.29 13.09,27.37 13.09,30.42 11.49,32.02 R2.1 10.28,32.91 9.47,33.73 J2.2
  Bottom 0.203: v25.44,27.81 24,27.81 v23.96,27.77
!SAFE1  (via drill 0.3)
  Top 0.203: U6.1 70.6,40.4 69.03,38.83 65.45,38.83 63.3,36.68 63.3,27.95 v63.44,27.81 | v61.96,27.77 61.96,25.4 61.2,24.64 57.38,24.64 55.73,26.29 52.17,26.29 51.09,27.37 51.09,30.42 49.49,32.02 R28.1 48.28,32.91 47.46,33.73 J7.2
  Bottom 0.203: v63.44,27.81 62,27.81 v61.96,27.77
!SAFE2  (via drill 0.3)
  Top 0.203: U10.1 108.6,40.4 107.03,38.83 103.45,38.83 101.3,36.68 101.3,27.95 v101.44,27.81 | v99.96,27.77 99.96,25.4 99.2,24.64 95.38,24.64 93.73,26.29 90.17,26.29 89.09,27.37 89.09,30.42 87.49,32.02 R44.1 86.28,32.91 85.46,33.73 J11.2
  Bottom 0.203: v101.44,27.81 100,27.81 v99.96,27.77
!SAFE3  (via drill 0.3)
  Top 0.203: U14.1 18.6,95.85 20.17,97.42 23.75,97.42 25.9,99.57 25.9,108.3 v25.76,108.44 | v27.24,108.48 27.24,110.85 28,111.61 31.83,111.61 33.48,109.96 37.03,109.96 38.11,108.88 38.11,105.83 39.71,104.23 R60.1 40.92,103.34 41.74,102.52 J15.2
  Bottom 0.203: v25.76,108.44 27.2,108.44 v27.24,108.48
!SAFE4  (via drill 0.3)
  Top 0.203: U18.1 56.6,95.85 58.17,97.42 61.75,97.42 63.9,99.57 63.9,108.3 v63.76,108.44 | v65.24,108.48 65.24,110.85 66,111.61 69.83,111.61 71.48,109.96 75.03,109.96 76.11,108.88 76.11,105.83 77.71,104.23 R76.1 78.92,103.34 79.74,102.52 J19.2
  Bottom 0.203: v63.76,108.44 65.2,108.44 v65.24,108.48
!SAFE5  (via drill 0.3)
  Top 0.203: U22.1 94.6,95.85 96.17,97.42 99.75,97.42 101.9,99.57 101.9,108.3 v101.76,108.44 | v103.24,108.48 103.24,110.85 104,111.61 107.82,111.61 109.47,109.96 113.03,109.96 114.11,108.88 114.11,105.83 115.71,104.23 R92.1 116.92,103.34 117.74,102.52 J23.2
  Bottom 0.203: v101.76,108.44 103.2,108.44 v103.24,108.48
A0  (via drill 0.3)
  Top 0.203: v16.08,9.78 15.95,9.91 U3.1
  Bottom 0.203: J1.36 26.1,4.58 22.94,7.75 17.86,7.75 16.08,9.53 v16.08,9.78
A1  (via drill 0.3)
  Top 0.203: U3.2 v17.22,9.78
  Bottom 0.203: v17.22,9.78 18.8,8.2 23.2,8.2 26.6,4.8 J1.34
A2  (via drill 0.3)